# EAGLE board RetroLite Rev 1.3 - Main Board (EAGLE 9.6.2), part 1 of 3
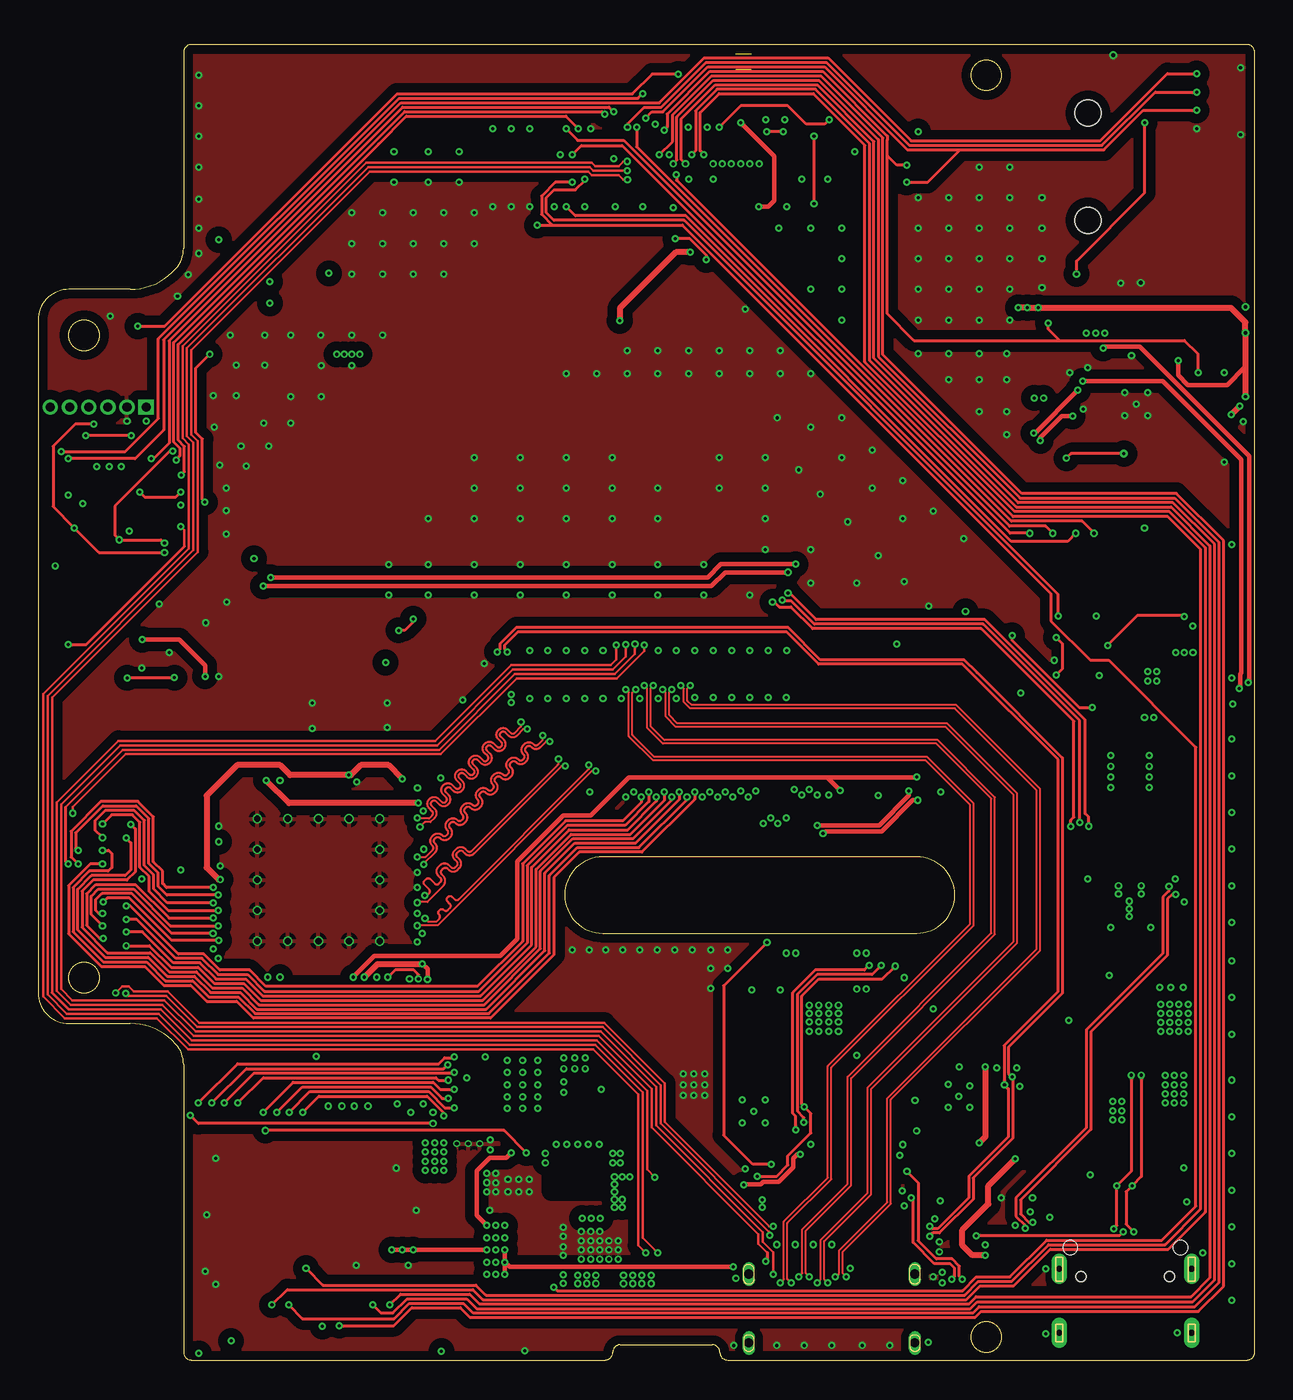
[diagram p0: board, top side]
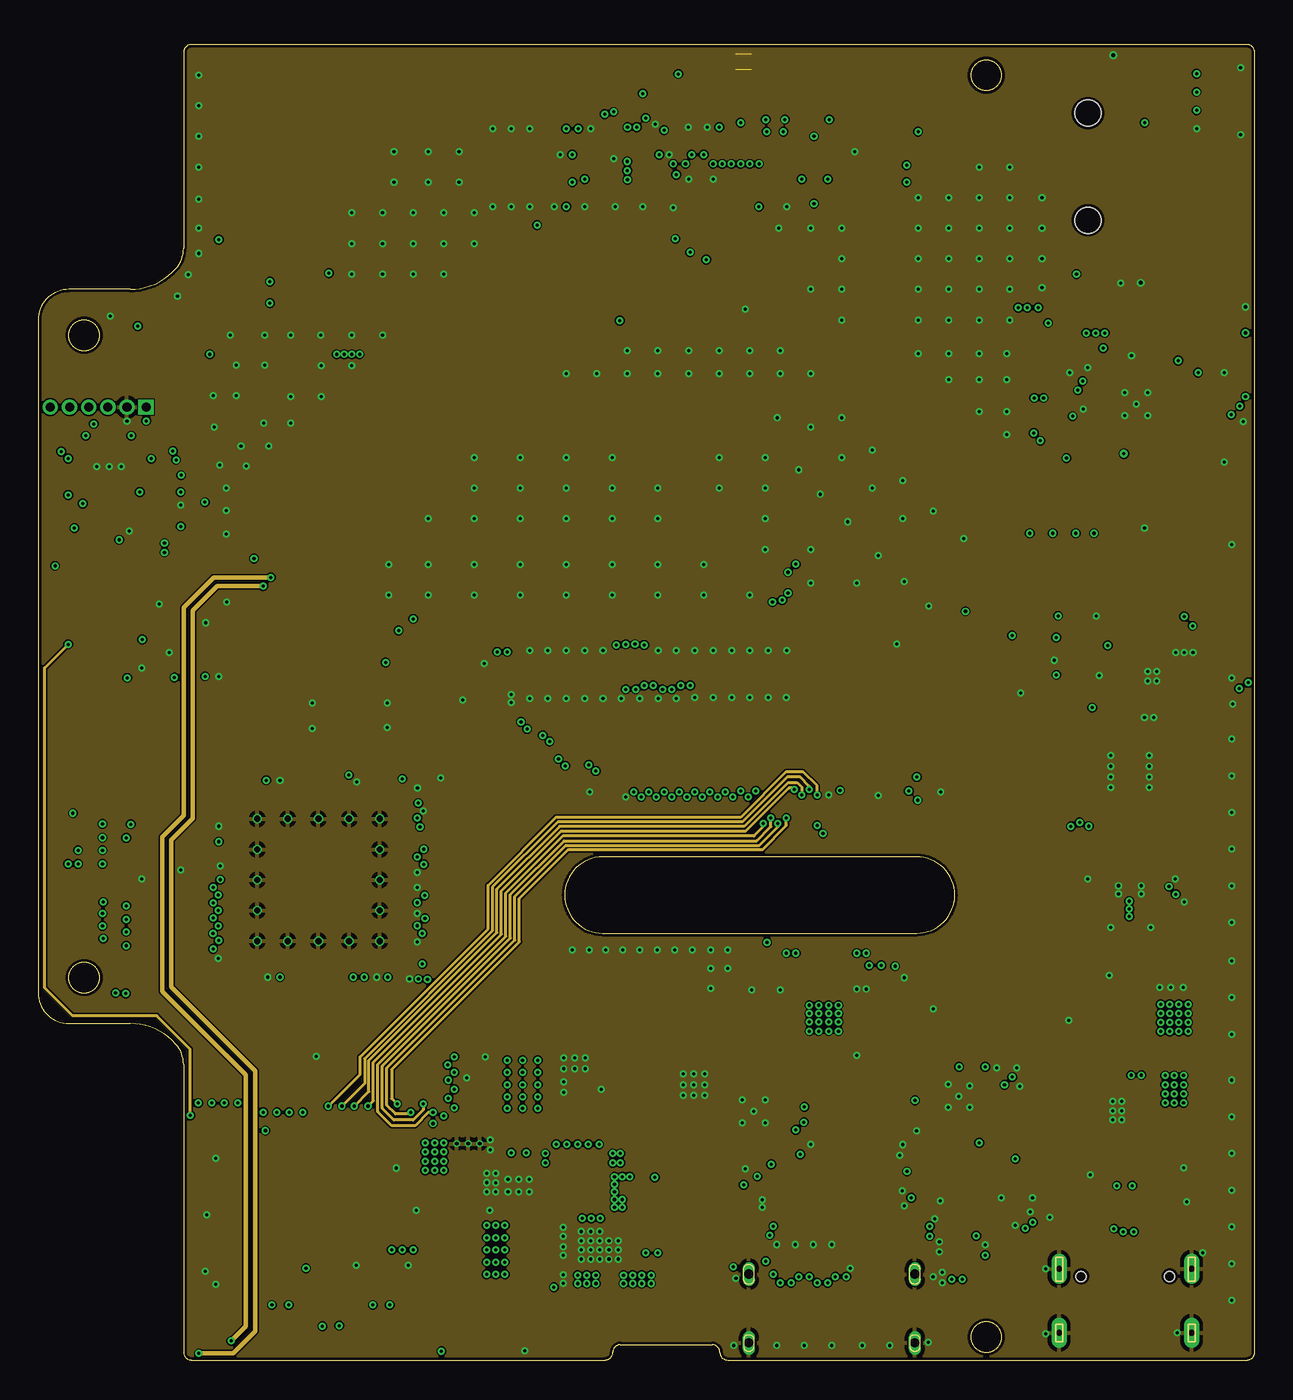
[diagram p1: board, inner layer Route2]
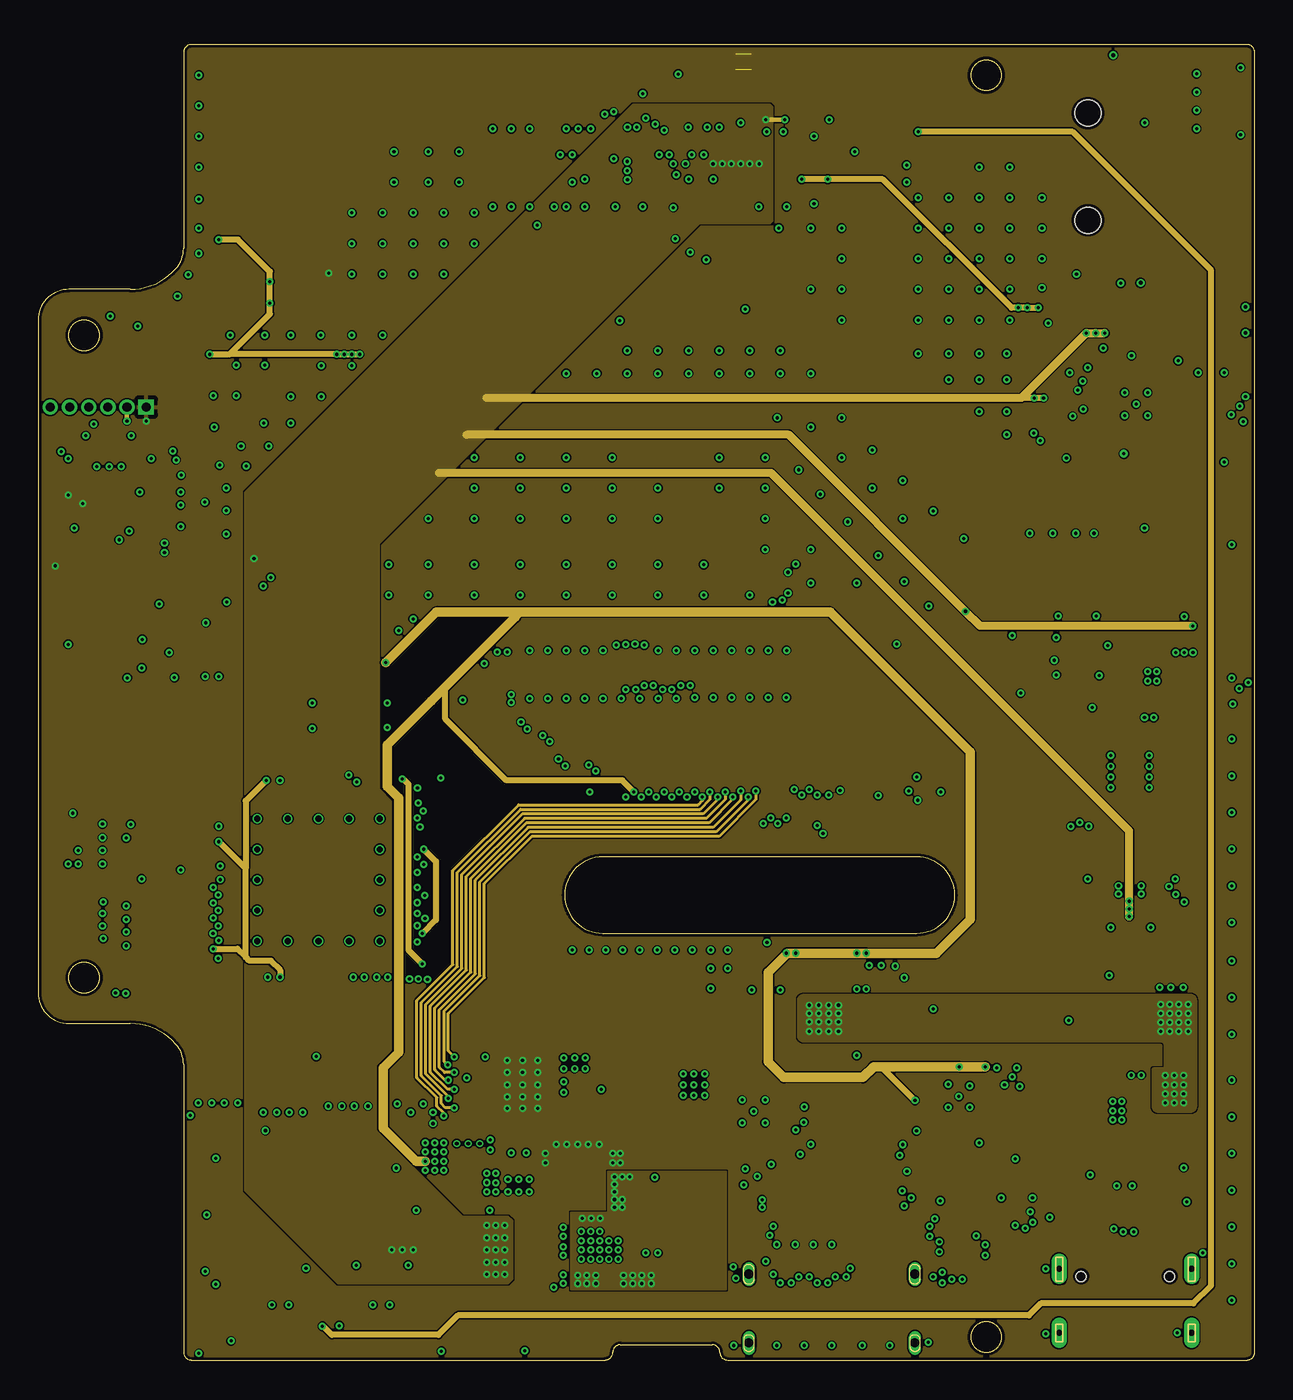
[diagram p2: board, inner layer Route15]
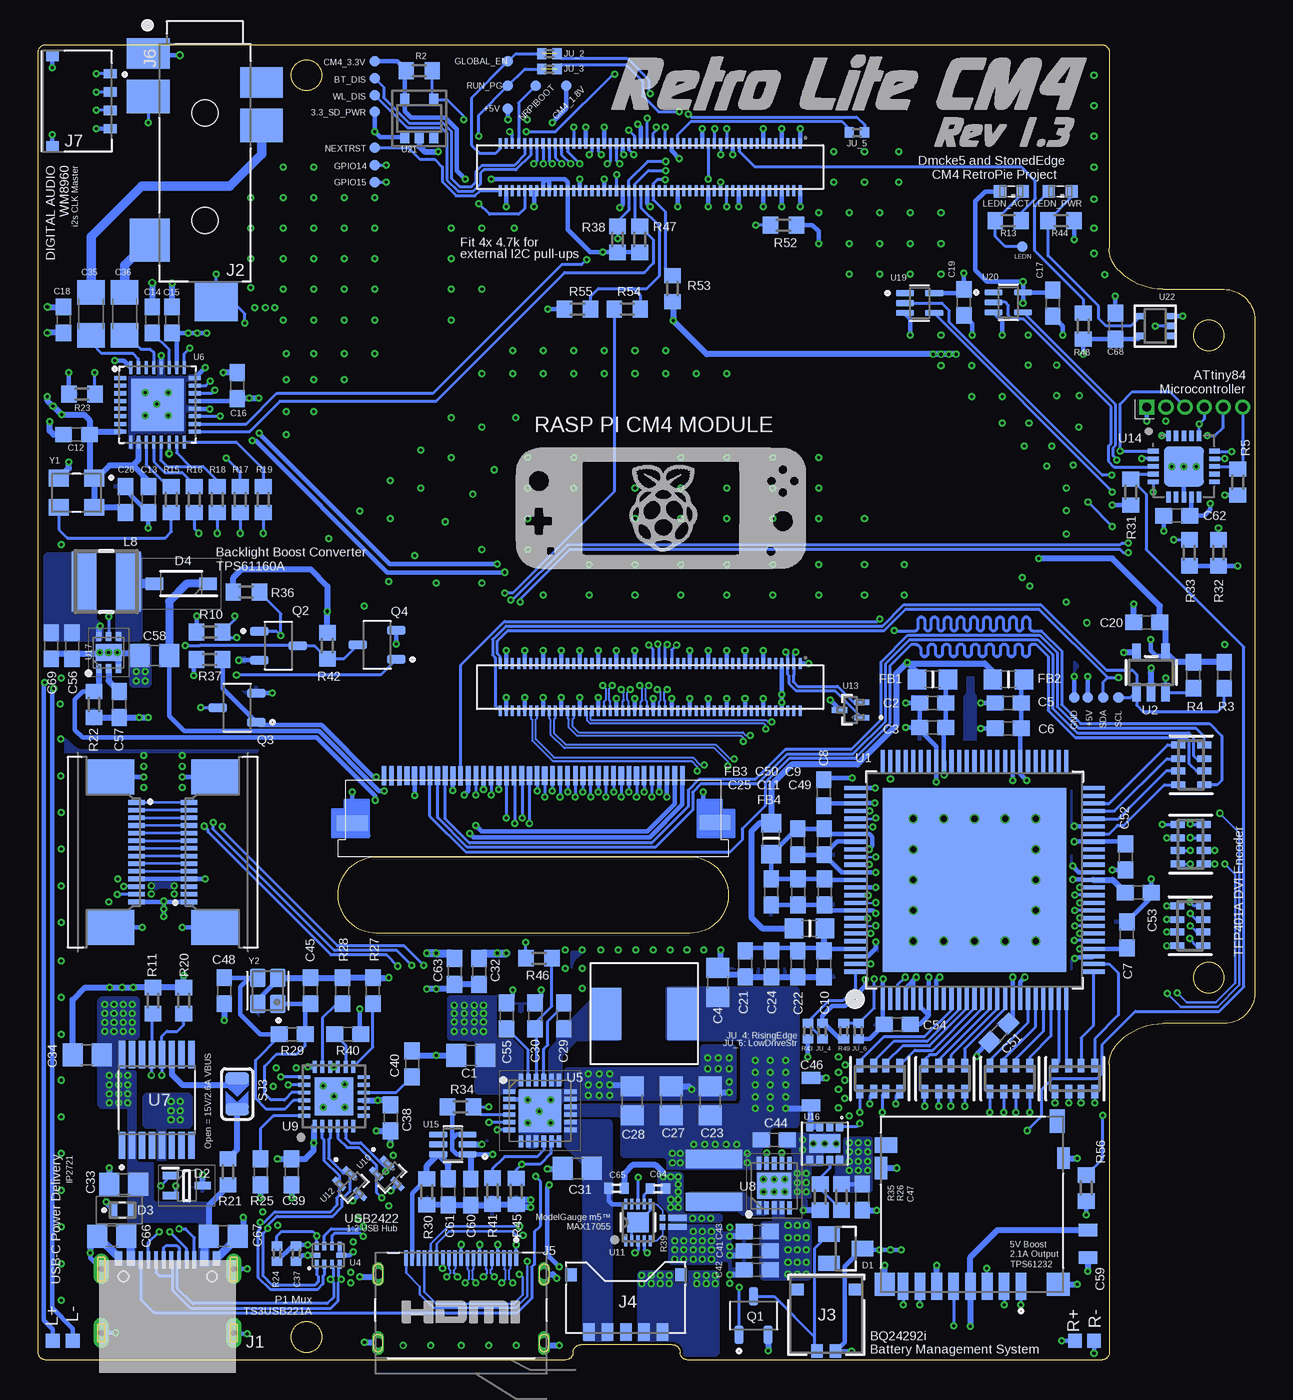
[diagram p3: board, bottom side, seen from below]

Size 79.5 x 86 mm. Coordinates in mm from the lower left corner, seen from the top.
Outline: 81 segments
Outline: circle at 3,25 radius 1
Outline: circle at 3,67 radius 1
Outline: circle at 61.96,1.5 radius 1
Outline: circle at 61.96,1.5 radius 1
Outline: circle at 61.96,84 radius 1
Outline: circle at 3,67 radius 1
Outline: circle at 3,25 radius 1
Copper layers (1+2*15+16): Top 0.035mm / dielectric 0.2mm / Route2 0.0175mm / dielectric 1.065mm / Route15 0.0175mm / dielectric 0.2mm / Bottom 0.035mm
Design rules "jlcpcb-4-layer_JLC7628-stackup *": minimum track width 3.5mil, minimum drill 0.2mm, track to track 3.5mil, track to pad 5mil, pad to pad 5mil, via to via 5mil, smd to smd 0mil, copper to edge 0.2mm, drill to drill 5mil, minimum pad ring 0.1mm, minimum via ring 0.13mm, stop-mask expansion 0mil, vias tented up to drill 100mil, thermal gap 10mil
Net classes: 1 USB 2.0 Differential Pair: width 0.192 mm, clearance 0.114 mm; 2 HDMI: width 0.126 mm, clearance 0.102 mm
bKeepout: area 36.5,19.5 to 43.2,25.9; 70 lines
tRestrict: area 33.5,11 to 37.1,12.4; area 74.5,49.1 to 75.6,52.7; area 60.7,19.6 to 61.2,20; area 5.5,54.1 to 9.2,56.1; area 1.5,53.3 to 6.7,58.7; area 45.4,13.4 to 50.2,26.6; area 52.4,21.8 to 55.7,24.3; area 56.1,8.9 to 61.4,19.4; area 53.2,5.1 to 57.4,9.8; area 46.8,9.5 to 51,13.9; area 22.8,78.8 to 34.3,80.9; area 69.9,64.3 to 78.1,68.2; 18 more areas; 1 lines
bRestrict: area 36.5,19.4 to 43.3,25.9; area 33.5,11.1 to 37.1,12.4; area 74.5,49.1 to 75.6,52.7; area 40.8,80.5 to 43.8,83.8; area 4.8,61 to 6.4,61.7; area 5,51.9 to 6.8,54.8; area 15.6,37.5 to 20.2,38.1; area 27.9,17.5 to 29.6,20.4; area 31.1,43.3 to 49.1,44.7; area 52.7,33.4 to 57.2,37.1; area 67.4,47.4 to 70.4,50.4; area 68.2,41.6 to 70.4,45.5; 31 more areas; 86 lines

## Footprints (pad centres in the part's own frame; a part is rotated, then mirrored left to right if it is on the bottom)
HRS_DF40C-100DS-0.4V(51) = smd 0.2 x 0.7: 1 -9.8,-1.54; 2 -9.8,1.54; 3 -9.4,-1.54; 4 -9.4,1.54; 5 -9,-1.54; 6 -9,1.54; 7 -8.6,-1.54; 8 -8.6,1.54; 9 -8.2,-1.54; 10 -8.2,1.54; 11 -7.8,-1.54; 12 -7.8,1.54; 13 -7.4,-1.54; 14 -7.4,1.54; 15 -7,-1.54; 16 -7,1.54; 17 -6.6,-1.54; 18 -6.6,1.54; 19 -6.2,-1.54; 20 -6.2,1.54; 21 -5.8,-1.54; 22 -5.8,1.54; 23 -5.4,-1.54; 24 -5.4,1.54; 25 -5,-1.54; 26 -5,1.54; 27 -4.6,-1.54; 28 -4.6,1.54; 29 -4.2,-1.54; 30 -4.2,1.54; 31 -3.8,-1.54; 32 -3.8,1.54; 33 -3.4,-1.54; 34 -3.4,1.54; 35 -3,-1.54; 36 -3,1.54; 37 -2.6,-1.54; 38 -2.6,1.54; 39 -2.2,-1.54; 40 -2.2,1.54; 41 -1.8,-1.54; 42 -1.8,1.54; 43 -1.4,-1.54; 44 -1.4,1.54; 45 -1,-1.54; 46 -1,1.54; 47 -0.6,-1.54; 48 -0.6,1.54; 49 -0.2,-1.54; 50 -0.2,1.54; 51 0.2,-1.54; 52 0.2,1.54; 53 0.6,-1.54; 54 0.6,1.54; 55 1,-1.54; 56 1,1.54; 57 1.4,-1.54; 58 1.4,1.54; 59 1.8,-1.54; 60 1.8,1.54; 61 2.2,-1.54; 62 2.2,1.54; 63 2.6,-1.54; 64 2.6,1.54; 65 3,-1.54; 66 3,1.54; 67 3.4,-1.54; 68 3.4,1.54; 69 3.8,-1.54; 70 3.8,1.54; 71 4.2,-1.54; 72 4.2,1.54; 73 4.6,-1.54; 74 4.6,1.54; 75 5,-1.54; 76 5,1.54; 77 5.4,-1.54; 78 5.4,1.54; 79 5.8,-1.54; 80 5.8,1.54; 81 6.2,-1.54; 82 6.2,1.54; 83 6.6,-1.54; 84 6.6,1.54; 85 7,-1.54; 86 7,1.54; 87 7.4,-1.54; 88 7.4,1.54; 89 7.8,-1.54; 90 7.8,1.54; 91 8.2,-1.54; 92 8.2,1.54; 93 8.6,-1.54; 94 8.6,1.54; 95 9,-1.54; 96 9,1.54; 97 9.4,-1.54; 98 9.4,1.54; 99 9.8,-1.54; 100 9.8,1.54
TP07R = smd 0.7 x 0.7: TP 0,0
C0805 = smd 1.3 x 1.5: 1 -0.95,0; 2 0.95,0
0603-NO = smd 1.1 x 1: 1 -0.85,0; 2 0.85,0
C0603 = smd 1.1 x 1: 1 -0.85,0; 2 0.85,0
C1206 = smd 1.6 x 1.8: 1 -1.4,0; 2 1.4,0
R0402 = smd 0.6 x 0.7: 1 -0.5,0; 2 0.5,0
0603 = smd 1.1 x 1: 1 -0.85,0; 2 0.85,0
0805 = smd 0.8 x 1.2: 1 -0.9,0; 2 0.9,0
C0402 = smd 0.6 x 0.7: 1 -0.5,0; 2 0.5,0
SOT23 = smd 1 x 1.4: 1 -0.95,-1.1; 2 0.95,-1.1; 3 0,1.1
SOT65P210X110-3N = smd 1.05 x 0.5: 1 -1.05,0.65; 2 -1.05,-0.65; 3 1.05,0
ESDA8P801U1M = smd 0.55 x 0.8: 1 -0.625,0; 2 0.625,0
SOD3716X135N = smd 1.15 x 0.8: 1 -1.75,0; 2 1.75,0
_0805MP = smd 1.2 x 1.3: 1 -1.016,0; 2 1.016,0
U262-161N-4BVC11 = smd 0.5 x 0.95: A1B12 -3.2,7.455; A4B9 -2.4,7.455; B1A12 3.2,7.455; B4A9 2.4,7.455 | smd 0.25 x 1.15: A5 -1.25,7.355; A6 -0.25,7.355; A7 0.25,7.355; A8 1.25,7.355; B5 1.75,7.355; B6 0.75,7.355; B7 -0.75,7.355; B8 -1.75,7.355 | drill 0.4 pad 1 long: SHIELD_1 -4.325,6.78; SHIELD_2 -4.325,2.6; SHIELD_3 4.325,6.78; SHIELD_4 4.325,2.6 | hole 0.65: -2.89,6.28; 2.89,6.28
CUI_SJ-43516-SMT = smd 2 x 2.8: 1 -7.15,-3.7; 6 -5.25,3.7 | smd 2.8 x 2.6: 2 5.05,-3.6 | smd 2.2 x 2.8: 3 -2.45,3.7; 4 -4.35,-3.7 | smd 2.6 x 2.8: 5 9.05,0.75 | hole 1.7: -3.25,0; 3.75,0
CONN_2026560021_MOL = smd 0.762 x 0.889: 1 -0.6,2.374; 2 0.6,2.374 | smd 0.838 x 0.762: 3 -1.9,-1.651; 4 1.9,-1.651
MOLEX_78171-0005 = smd 0.75 x 1.143: 1 -2.4,1.875; 2 -1.2,1.875; 3 0,1.875; 4 1.2,1.875; 5 2.4,1.875 | smd 0.75 x 0.85: P$6 -3.6,-1.875; P$7 3.575,-1.875
WURTH_685119136923 = smd 0.23 x 1: 1 3.6,0; 2 3.2,0; 3 2.8,0; 4 2.4,0; 5 2,0; 6 1.6,0; 7 1.2,0; 8 0.8,0; 9 0.4,0; 10 0,0; 11 -0.4,0; 12 -0.8,0; 13 -1.2,0; 14 -1.6,0; 15 -2,0; 16 -2.4,0; 17 -2.8,0; 18 -3.2,0; 19 -3.6,0 | drill 0.6 pad 0.762 long: S1 -5.425,-1.05; S2 -5.425,-5.55; S3 5.425,-5.55; S4 5.425,-1.05
MOLEX_0781710004 = smd 0.6 x 0.85: 1 -1.8,0; 2 -0.6,0; 3 0.6,0; 4 1.8,0 | smd 0.7 x 0.8: S1 2.95,-3.775; S2 -2.95,-3.775
ASPI-0630HI = smd 2 x 3.4: P$1 -2.5,0; P$2 2.5,0
VLCF4020_1 = smd 3.9 x 1.6: 1 0,-1.45; 2 0,1.45
TP09SQ = smd 0.9 x 0.9: TP 0,0
SML0603 = smd 0.8 x 0.8: A 0.75,0; C -0.75,0
TE_1-1734839-4 = smd 0.3 x 1.1: 1 -3.25,0; 2 -2.75,0; 3 -2.25,0; 4 -1.75,0; 5 -1.25,0; 6 -0.75,0; 7 -0.25,0; 8 0.25,0; 9 0.75,0; 10 1.25,0; 11 1.75,0; 12 2.25,0; 13 2.75,0; 14 3.25,0 | smd 2.3 x 3.1: P1 -4.92,-1.7; P2 4.92,-1.7
AMPHENOL_1140084168 = smd 0.7 x 1.75: 1 3.2,-0.875; 2 2.1,-0.875; 3 1,-0.875; 4 -0.1,-0.875; 5 -1.2,-0.875; 6 -2.3,-0.875; 7 -3.4,-0.875; 8 -4.5,-0.875 | smd 1 x 1.55: 9 5.575,9.925 | smd 1.45 x 1: 10 -5.625,8.35 | smd 1.5 x 1.5: S1 5.65,-0.75 | smd 1.3 x 1.5: S2 -5.7,-0.75 | smd 0.8 x 1.4: S3 5.975,7.5 | smd 0.8 x 1.5: S4 -5.95,6.85
IC-RT9742 = smd 0.6 x 0.8: /FLG 0.94,-1.25; EN 0.94,1.196; GND 0,-1.25; VIN -0.94,1.196; VOUT -0.94,-1.25
SOT95P280X125-3N = smd 1.21 x 0.59: 1 -1.255,0.95; 2 -1.255,-0.95; 3 1.255,0
RESPACK_4X0603 = smd 0.45 x 0.9: 1 -1.3,-0.85; 2 -0.4,-0.85; 3 0.4,-0.85; 4 1.3,-0.85; 5 1.3,0.85; 6 0.4,0.85; 7 -0.4,0.85; 8 -1.3,0.85
R0603 = smd 1 x 1.1: 1 -0.85,0; 2 0.85,0
PS0306DRF7T0R01L = smd 0.4 x 1.2: 1 -0.3,-0.075; 4 0.3,-0.075 | smd 0.4 x 0.35: 2 -0.3,0.9; 3 0.3,0.9
SOLDERJUMPER_ARROW_NOPASTE = smd 0.762 x 1.524: 1 -1.016,0; 2 1.016,0
S-PQFP-G100 = smd 0.27 x 1.5: 1 -6,-7.75; 2 -5.5,-7.75; 3 -5,-7.75; 4 -4.5,-7.75; 5 -4,-7.75; 6 -3.5,-7.75; 7 -3,-7.75; 8 -2.5,-7.75; 9 -2,-7.75; 10 -1.5,-7.75; 11 -1,-7.75; 12 -0.5,-7.75; 13 0,-7.75; 14 0.5,-7.75; 15 1,-7.75; 16 1.5,-7.75; 17 2,-7.75; 18 2.5,-7.75; 19 3,-7.75; 20 3.5,-7.75; 21 4,-7.75; 22 4.5,-7.75; 23 5,-7.75; 24 5.5,-7.75; 25 6,-7.75; 51 6,7.75; 52 5.5,7.75; 53 5,7.75; 54 4.5,7.75; 55 4,7.75; 56 3.5,7.75; 57 3,7.75; 58 2.5,7.75; 59 2,7.75; 60 1.5,7.75; 61 1,7.75; 62 0.5,7.75; 63 0,7.75; 64 -0.5,7.75; 65 -1,7.75; 66 -1.5,7.75; 67 -2,7.75; 68 -2.5,7.75; 69 -3,7.75; 70 -3.5,7.75; 71 -4,7.75; 72 -4.5,7.75; 73 -5,7.75; 74 -5.5,7.75; 75 -6,7.75 | smd 1.5 x 0.27: 26 7.75,-6; 27 7.75,-5.5; 28 7.75,-5; 29 7.75,-4.5; 30 7.75,-4; 31 7.75,-3.5; 32 7.75,-3; 33 7.75,-2.5; 34 7.75,-2; 35 7.75,-1.5; 36 7.75,-1; 37 7.75,-0.5; 38 7.75,0; 39 7.75,0.5; 40 7.75,1; 41 7.75,1.5; 42 7.75,2; 43 7.75,2.5; 44 7.75,3; 45 7.75,3.5; 46 7.75,4; 47 7.75,4.5; 48 7.75,5; 49 7.75,5.5; 50 7.75,6; 76 -7.75,6; 77 -7.75,5.5; 78 -7.75,5; 79 -7.75,4.5; 80 -7.75,4; 81 -7.75,3.5; 82 -7.75,3; 83 -7.75,2.5; 84 -7.75,2; 85 -7.75,1.5; 86 -7.75,1; 87 -7.75,0.5; 88 -7.75,0; 89 -7.75,-0.5; 90 -7.75,-1; 91 -7.75,-1.5; 92 -7.75,-2; 93 -7.75,-2.5; 94 -7.75,-3; 95 -7.75,-3.5; 96 -7.75,-4; 97 -7.75,-4.5; 98 -7.75,-5; 99 -7.75,-5.5; 100 -7.75,-6 | drill 0.4: P$1 -4,4; P$2 -2,4; P$3 0,4; P$4 2,4; P$5 4,4; P$6 4,2; P$7 4,0; P$8 4,-2; P$9 4,-4; P$10 2,-4; P$11 0,-4; P$12 -2,-4; P$13 -4,-4; P$14 -4,-2; P$15 -4,0; P$16 -4,2 | smd 12 x 12: THERMAL 0,0
SOT23-5 = smd 0.55 x 1.2: 1 -0.95,-1.3; 2 0,-1.3; 3 0.95,-1.3; 4 0.95,1.3; 5 -0.95,1.3
S62684-402100ALF = smd 2 x 1: P$1 -11.83,2.19; P$2 11.87,2.24 | smd 0.3 x 1.2: P$3 -9.75,5.3; P$4 -9.25,5.3; P$5 -8.75,5.3; P$6 -8.25,5.3; P$7 -7.75,5.3; P$8 -7.25,5.3; P$9 -6.75,5.3; P$10 -6.25,5.3; P$11 -5.75,5.3; P$12 -5.25,5.3; P$13 -4.75,5.3; P$14 -4.25,5.3; P$15 -3.75,5.3; P$16 -3.25,5.3; P$17 -2.75,5.3; P$18 -2.25,5.3; P$19 -1.75,5.3; P$20 -1.25,5.3; P$21 -0.75,5.3; P$22 -0.25,5.3; P$23 0.25,5.3; P$24 0.75,5.3; P$25 1.25,5.3; P$26 1.75,5.3; P$27 2.25,5.3; P$28 2.75,5.3; P$29 3.25,5.3; P$30 3.75,5.3; P$31 4.25,5.3; P$32 4.75,5.3; P$33 5.25,5.3; P$34 5.75,5.3; P$35 6.25,5.3; P$36 6.75,5.3; P$37 7.25,5.3; P$38 7.75,5.3; P$39 8.25,5.3; P$40 8.75,5.3; P$41 9.25,5.3; P$42 9.75,5.3
QFN-10-RSE = smd 0.58 x 0.25: 1 -0.6,0.75; 2 -0.6,0.25; 3 -0.6,-0.25; 4 -0.6,-0.75; 6 0.6,-0.75; 7 0.6,-0.25; 8 0.6,0.25; 9 0.6,0.75 | smd 0.35 x 0.63: 5 0,-0.85; 10 0,0.85
QFN50P400X400X100-25N = smd 0.8 x 0.3: 1 -2,1.25; 2 -2,0.75; 3 -2,0.25; 4 -2,-0.25; 5 -2,-0.75; 6 -2,-1.25; 13 2,-1.25; 14 2,-0.75; 15 2,-0.25; 16 2,0.25; 17 2,0.75; 18 2,1.25 | smd 0.3 x 0.8: 7 -1.25,-2; 8 -0.75,-2; 9 -0.25,-2; 10 0.25,-2; 11 0.75,-2; 12 1.25,-2; 19 1.25,2; 20 0.75,2; 21 0.25,2; 22 -0.25,2; 23 -0.75,2; 24 -1.25,2 | smd 2.8 x 2.8: 25 0,0
QFN50P500X500X100-33N = smd 0.86 x 0.27: 1 -2.435,1.75; 2 -2.435,1.25; 3 -2.435,0.75; 4 -2.435,0.25; 5 -2.435,-0.25; 6 -2.435,-0.75; 7 -2.435,-1.25; 8 -2.435,-1.75; 17 2.435,-1.75; 18 2.435,-1.25; 19 2.435,-0.75; 20 2.435,-0.25; 21 2.435,0.25; 22 2.435,0.75; 23 2.435,1.25; 24 2.435,1.75 | smd 0.27 x 0.86: 9 -1.75,-2.435; 10 -1.25,-2.435; 11 -0.75,-2.435; 12 -0.25,-2.435; 13 0.25,-2.435; 14 0.75,-2.435; 15 1.25,-2.435; 16 1.75,-2.435; 25 1.75,2.435; 26 1.25,2.435; 27 0.75,2.435; 28 0.25,2.435; 29 -0.25,2.435; 30 -0.75,2.435; 31 -1.25,2.435; 32 -1.75,2.435 | smd 3.45 x 3.45: 33 0,0
TSSOP-16 = smd 1.78 x 0.42: 1 -2.97,2.275; 2 -2.97,1.625; 3 -2.97,0.975; 4 -2.97,0.325; 5 -2.97,-0.325; 6 -2.97,-0.975; 7 -2.97,-1.625; 8 -2.97,-2.275; 9 2.97,-2.275; 10 2.97,-1.625; 11 2.97,-0.975; 12 2.97,-0.325; 13 2.97,0.325; 14 2.97,0.975; 15 2.97,1.625; 16 2.97,2.275
SON50P300X300X100-11N = smd 0.85 x 0.3: 1 -1.45,1; 2 -1.45,0.5; 3 -1.45,0; 4 -1.45,-0.5; 5 -1.45,-1; 6 1.45,-1; 7 1.45,-0.5; 8 1.45,0; 9 1.45,0.5; 10 1.45,1 | smd 1.7 x 2.25: 11 0,0
SQFN24_4X4MC_MCH = smd 0.808 x 0.255: 1 -1.941,1.27; 2 -1.941,0.762; 3 -1.941,0.254; 4 -1.941,-0.254; 5 -1.941,-0.762; 6 -1.941,-1.27; 13 1.941,-1.27; 14 1.941,-0.762; 15 1.941,-0.254; 16 1.941,0.254; 17 1.941,0.762; 18 1.941,1.27 | smd 0.255 x 0.808: 7 -1.27,-1.941; 8 -0.762,-1.941; 9 -0.254,-1.941; 10 0.254,-1.941; 11 0.762,-1.941; 12 1.27,-1.941; 19 1.27,1.941; 20 0.762,1.941; 21 0.254,1.941; 22 -0.254,1.941; 23 -0.762,1.941; 24 -1.27,1.941 | smd 2.489 x 2.489: 25 0,0
SC75-3L_SEM = smd 0.365 x 1.005: 1 -0.495,-0.724; 2 0.495,-0.724; 3 0,0.724
21-100013A_T102A2+1C_MXM = smd 0.711 x 0.203: 1 -1.194,0.8; 2 -1.194,0.4; 3 -1.194,0; 4 -1.194,-0.4; 5 -1.194,-0.8; 6 1.194,-0.8; 7 1.194,-0.4; 8 1.194,0; 9 1.194,0.4; 10 1.194,0.8 | smd 1.295 x 1.397: 11 0,0
QFN20G-0.5-4X4MM = smd 0.7 x 0.3: 1 -2,1; 2 -2,0.5; 3 -2,0; 4 -2,-0.5; 5 -2,-1; 11 2,-1; 12 2,-0.5; 13 2,0; 14 2,0.5; 15 2,1 | smd 0.3 x 0.7: 6 -1,-2; 7 -0.5,-2; 8 0,-2; 9 0.5,-2; 10 1,-2; 16 1,2; 17 0.5,2; 18 0,2; 19 -0.5,2; 20 -1,2 | smd 2.6 x 2.6: PAD 0,0
SOT65P210X110-6N = smd 1.19 x 0.4: 1 -0.96,0.65; 2 -0.96,0; 3 -0.96,-0.65; 4 0.96,-0.65; 5 0.96,0; 6 0.96,0.65
SON65P280X300X133-9N = smd 0.63 x 0.5: 1 -1.1,0.975; 2 -1.1,0.325; 3 -1.1,-0.325; 4 -1.1,-0.975; 5 1.1,-0.975; 6 1.1,-0.325; 7 1.1,0.325; 8 1.1,0.975 | smd 1.2 x 2: 9 0,0 | drill 0.254: P$1 0,0; P$2 0,0.75; P$3 0,-0.75
SON65P200X200X80-7N = smd 0.6 x 0.35: 1 -1.05,0.65; 2 -1.05,0; 3 -1.05,-0.65; 4 1.05,-0.65; 5 1.05,0; 6 1.05,0.65 | smd 1.1 x 1.7: 7 0,0
INDUCTOR_SMALL = smd 1.2 x 3.7: 1 -1.4,0; 2 1.4,0
SOT65P210X110-5N = smd 1.19 x 0.4: 1 -0.96,0.65; 2 -0.96,0; 3 -0.96,-0.65; 4 0.96,-0.65; 5 0.96,0.65
BUF-74LVC1G07 = smd 0.42 x 0.6: A 0,-0.95; GND 0.65,-0.95; NC -0.65,-0.95; VCC -0.65,0.95; Y 0.65,0.95
1MM_PIC-PROGRAMING_HEADER = drill 0.6 pad 1 square: 1 -1.25,1 | drill 0.6 pad 1: 2 0,1; 3 1.25,1; 4 2.5,1; 5 3.75,1; 6 5.02,1
OSC_ECS-2333-160-BN-TR = smd 1.3 x 1.1: 1 -1.15,-0.95; 2 1.15,-0.95; 3 1.15,0.95; 4 -1.15,0.95
XTAL_ECS-160-10-36-JGN-TR = smd 1.2 x 1: 1 -0.85,-0.65; 2 0.85,-0.65; 3 0.85,0.65; 4 -0.85,0.65

## Placement (x,y rotation side)
1-100  DF40C-100DS-0.4V(51)  [HRS_DF40C-100DS-0.4V(51)]  39.51,78 180 bottom
3.3_SD_PWR  TPTP07R  [TP07R]  57.5,81.6 0 bottom
101-200  DF40C-100DS-0.4V(51)  [HRS_DF40C-100DS-0.4V(51)]  39.51,43.99 180 bottom
+5V  TPTP07R  [TP07R]  48.8,81.8 0 bottom
BT_DIS  TPTP07R  [TP07R]  57.5,83.8 0 bottom
C1  1µF  [C0805]  51.22,19.92 0 bottom
C2  0.01uF  [0603-NO]  21.05,42.95 180 bottom
C3  0.01uF  [0603-NO]  21.05,41.35 180 bottom
C4  10µF  [C0805]  35.09,24.69 270 bottom
C5  0.01uF  [0603-NO]  16.1,42.95 180 bottom
C6  0.01uF  [0603-NO]  16.1,41.3 180 bottom
C7  0.01uF  [0603-NO]  8.35,27.8 90 bottom
C8  0.01uF  [0603-NO]  28.16,37.09 90 bottom
C9  0.01uF  [0603-NO]  28.13,33.88 270 bottom
C10  0.01uF  [0603-NO]  28.15,25.9 270 bottom
C11  0.01uF  [0603-NO]  29.85,30.61 270 bottom
C12  0.1uF  [C0603]  77,60.5 180 bottom
C13  0.1uF  [C0603]  72.3,56.25 270 bottom
C14  4.7uF  [C0603]  72.05,68 90 bottom
C15  4.7uF  [C0603]  70.75,68 90 bottom
C16  4.7uF  [C0603]  66.5,63.7 90 bottom
C17  0.1uF  [C0603]  13.2,69.1 270 bottom
C18  0.1uF  [C0603]  77.85,68 270 bottom
C19  0.1uF  [C0603]  19,69.15 90 bottom
C20  0.1uF  [0603-NO]  7.05,48.23 180 bottom
C21  0.01uF  [0603-NO]  33.3,25.9 270 bottom
C22  0.01uF  [0603-NO]  29.87,25.9 270 bottom
C23  10µF  [C0805]  35.58,16.95 270 bottom
C24  22uF  [0603-NO]  31.58,25.9 270 bottom
C25  0.01uF  [0603-NO]  31.6,30.61 270 bottom
C26  0.1uF  [C0603]  73.8,56.25 270 bottom
C27  10µF  [C0805]  38.13,16.95 270 bottom
C28  10µF  [C0805]  40.68,16.95 270 bottom
C29  0.047µF  [C0603]  45.16,22.5 90 bottom
C30  1uF  [C0603]  47.03,22.5 270 bottom
C31  10µF  [C0805]  44.27,12.52 0 bottom
C32  1uF  [0603-NO]  50.7,25.4 270 bottom
C33  1uF  [C0805]  73.91,11.5 180 bottom
C34  1uF  [C0805]  76.3,19.95 180 bottom
C35  100uF  [C1206]  76.05,68.4 90 bottom
C36  100uF  [C1206]  73.85,68.4 90 bottom
C37  0.1uF  [R0402]  62.65,6.95 270 bottom
C38  1uF  [C0603]  56.48,15.83 270 bottom
C39  100nF  [C0603]  62.94,12.3 270 bottom
C40  1uF  [C0603]  55.07,19.37 270 bottom
C41  1.0uF  [0603]  32.52,7.14 180 bottom
C42  1.0uF  [0603]  32.52,5.89 180 bottom
C43  1.0uF  [0603]  32.5,8.4 180 bottom
C44  1.0uF  [0603]  31.4,14.4 180 bottom
C45  18pF  [C0603]  61.7,24.15 90 bottom
C46  10uF  [0805]  29,17.55 270 bottom
C47  1.0uF  [0603]  25.65,10.65 90 bottom
C48  18pF  [C0603]  67.35,24.15 270 bottom
C49  0.01uF  [0603-NO]  28.12,30.61 270 bottom
C50  22uF  [0603-NO]  29.87,33.88 270 bottom
C51  0.01uF  [0603-NO]  16.71,21.4 225 bottom
C52  22uF  [0603-NO]  8.44,32.9 270 bottom
C53  0.01uF  [0603-NO]  7.6,30.55 0 bottom
C54  0.01uF  [0603-NO]  23.35,21.95 180 bottom
C55  1uF  [C0603]  48.9,22.5 270 bottom
C56  1µF  [C0603]  77.3,46.7 270 bottom
C57  220nF  [C0603]  74.2,42.85 90 bottom
C58  4.7µF 50v  [C0805]  71.9,46.05 180 bottom
C59  10uF  [0805]  10.9,7.6 90 bottom
C60  1uF  [0603-NO]  51.24,10.98 270 bottom
C61  18nF  [0603-NO]  52.7,11 270 bottom
C62  0.1uF  [C0603]  5.1,55.2 0 bottom
C63  1uF  [0603-NO]  52.3,25.4 270 bottom
C64  0.47uF  [C0402]  39,11.2 0 bottom
C65  0.1uF  [C0402]  41.71,11.23 0 bottom
C66  10uF  [C0805]  74.7,8.1 0 bottom
C67  10uF  [C0805]  67.4,8.1 180 bottom
C68  1.0uF  [0603]  9.1,67.6 270 bottom
C69  1µF  [C0603]  78.65,46.7 270 bottom
CM4_1.8V  TPTP07R  [TP07R]  45,83.3 180 bottom
CM4_3.3V  TPTP07R  [TP07R]  57.5,84.9 0 bottom
D1  BAS70  [SOT23]  26.73,7.28 270 bottom
D2  ESDA25W  [SOT65P210X110-3N]  69.8,11.4 0 bottom
D3  ESDA25P35-1U1M  [ESDA8P801U1M]  74,9.8 0 bottom
D4  MBR0540T1G  [SOD3716X135N]  70.15,50.75 180 bottom
FB1  Ferrite  [_0805MP]  21.05,44.5 0 bottom
FB2  Ferrite  [_0805MP]  16.1,44.5 0 bottom
FB3  Ferrite  [_0805MP]  31.6,34.08 270 bottom
FB4  Ferrite  [_0805MP]  29.09,28.22 0 bottom
GLOBAL_EN  TPTP07R  [TP07R]  48.8,84.9 0 bottom
GPIO14  TPTP07R  [TP07R]  57.5,78.12 0 bottom
GPIO15  TPTP07R  [TP07R]  57.5,77 0 bottom
J1  U262-161N-4BVC11  [U262-161N-4BVC11]  71.05,-0.82 0 bottom
J2  SJ-43516-SMT  [CUI_SJ-43516-SMT]  68.61,78.27 270 bottom
J3  2026560021  [CONN_2026560021_MOL]  28,2.95 180 bottom
J4  78171-0005  [MOLEX_78171-0005]  41.1,3.7 180 bottom
J5  685119136923  [WURTH_685119136923]  51.86,6.67 0 bottom
J6  0781710004  [MOLEX_0781710004]  74.8,82.3 270 bottom
JU_2  0  [R0402]  46.1,85.4 0 bottom
JU_3  0  [R0402]  46.1,84.4 0 bottom
JU_4  0  [R0402]  28.25,21.5 90 bottom
JU_5  0  [R0402]  26,80.25 180 bottom
JU_6  0  [R0402]  25.9,21.5 90 bottom
L6  ASPI-0630HI  [ASPI-0630HI]  39.89,22.64 0 bottom
L8  22µH  [VLCF4020_1]  75.05,50.9 270 bottom
L+  TPSTP09SQ  [TP09SQ]  78.55,1.25 0 bottom
L-  TPSTP09SQ  [TP09SQ]  77.25,1.25 0 bottom
LEDN  TPTP07R  [TP07R]  15.2,72.8 0 bottom
LEDN_ACT  [SML0603]  15.9,76.4 180 bottom
LEDN_PWR  [SML0603]  12.7,76.4 180 bottom
LEFTPCB  1-1734839-4  [TE_1-1734839-4]  69.65,33.2 90 bottom
M-SD  1140084168  [AMPHENOL_1140084168]  18.48,5.7 0 bottom
MICROSD_SWI  IC-RT9742  [IC-RT9742]  54.6,81.2 0 bottom
NEXTRST  TPTP07R  [TP07R]  57.5,79.25 0 bottom
NRPIBOOT  TPTP07R  [TP07R]  47,83.3 0 bottom
Q1  AO3400A  [SOT95P280X125-3N]  32.75,2.9 90 bottom
Q2  AO3400A  [SOT95P280X125-3N]  63.8,46.7 0 bottom
Q3  AO3400A  [SOT95P280X125-3N]  66.5,42.65 180 bottom
Q4  AO3400A  [SOT95P280X125-3N]  57.35,46.75 180 bottom
R1  33  [RESPACK_4X0603]  24.5,18.4 180 bottom
R2  12k  [R0603]  54.6,84.3 0 bottom
R3  4.7k  [0603-NO]  1.99,44.77 90 bottom
R4  4.7k  [0603-NO]  3.99,44.77 90 bottom
R5  4.7k  [R0603]  1.1,57.4 90 bottom
R6  33  [RESPACK_4X0603]  4.21,28.39 90 bottom
R7  33  [RESPACK_4X0603]  4.18,33.73 90 bottom
R8  33  [RESPACK_4X0603]  16,18.4 180 bottom
R9  33  [RESPACK_4X0603]  11.75,18.4 180 bottom
R10  10k  [R0603]  68.3,47.6 180 bottom
R11  5.1k  [R0603]  72,23.5 90 bottom
R12  33  [RESPACK_4X0603]  4.15,38.91 270 bottom
R13  1k  [R0603]  16.1,74.5 180 bottom
R14  33  [RESPACK_4X0603]  20.25,18.4 180 bottom
R15  10R  [R0603]  70.8,56.25 90 bottom
R16  10R  [R0603]  69.3,56.25 90 bottom
R17  10R  [R0603]  66.3,56.25 90 bottom
R18  10R  [R0603]  67.8,56.25 90 bottom
R19  10R  [R0603]  64.8,56.25 90 bottom
R20  5.1k  [R0603]  70,23.5 90 bottom
R21  100k  [R0603]  67.1,12.3 90 bottom
R22  5Ω  [R0603]  75.86,42.86 270 bottom
R23  10K  [R0603]  76.65,63.15 180 bottom
R24  100K  [R0402]  63.9,6.95 270 bottom
R25  12k  [0603]  64.98,12.3 270 bottom
R26  510K  [R0603]  27,10.65 90 bottom
R27  56k  [0603]  57.63,24.15 90 bottom
R28  56k  [0603]  59.62,24.15 90 bottom
R29  56k  [0603]  62.9,21.3 180 bottom
R30  1K  [R0603]  54.1,11 270 bottom
R31  10k  [R0603]  8.1,56.75 90 bottom
R32  4.7k  [R0603]  2.37,52.77 90 bottom
R33  4.7k  [R0603]  4.26,52.77 90 bottom
R34  10k  [R0603]  51.9,16.55 0 bottom
R35  162K  [R0603]  28.4,10.65 90 bottom
R36  10k  [R0603]  65.9,50.2 180 bottom
R37  10k  [R0603]  68.3,45.8 0 bottom
R38  4.7k  [R0603]  41.64,73.27 90 bottom
R39  PS0306DRF7T0R01L  [PS0306DRF7T0R01L]  37.8,9 90 bottom
R40  56k  [0603]  59.27,21.3 0 bottom
R41  261Ω  [R0603]  49.81,11.05 90 bottom
R42  10k  [R0603]  60.6,46.7 90 bottom
R43  10k  [R0402]  29.2,21.5 90 bottom
R44  10k  [R0603]  12.65,74.5 180 bottom
R45  10kΩ  [R0603]  48.27,11.03 90 bottom
R46  10kΩ  [R0603]  46.78,26.27 0 bottom
R47  4.7k  [R0603]  40.18,73.27 90 bottom
R48  2.2k  [R0603]  11.2,67.6 90 bottom
R49  10k  [R0402]  26.85,21.5 270 bottom
R52  10k  [R0603]  30.8,74.2 180 bottom
R53  4.7k  [R0603]  38.05,70.05 90 bottom
R54  1k  [R0603]  41,68.7 0 bottom
R55  15k  [R0603]  44.25,68.7 180 bottom
R56  10k  [R0603]  11,11.25 90 bottom
R+  TPSTP09SQ  [TP09SQ]  11.75,1.25 0 bottom
R-  TPSTP09SQ  [TP09SQ]  10.5,1.25 0 bottom
RIGHTPCB  1-1734839-4  [TE_1-1734839-4]  73.08,33.2 270 bottom
RUN_PG  TPTP07R  [TP07R]  48.8,83.3 180 bottom
SJ3  [SOLDERJUMPER_ARROW_NOPASTE]  66.5,17.4 270 bottom
TP1  TPTP07R  [TP07R]  8.9,43.3 0 bottom
TP2  TPTP07R  [TP07R]  9.9,43.3 0 bottom
TP3  TPTP07R  [TP07R]  10.9,43.3 0 bottom
TP4  TPTP07R  [TP07R]  11.8,43.3 90 bottom
U1  TFP401  [S-PQFP-G100]  18.31,31.39 0 bottom
U2  24LC02BT-I/OT  [SOT23-5]  6.77,44.96 0 bottom
U3  S62684-402100ALF  [S62684-402100ALF]  47.15,32.9 0 bottom
U4  TS3USB221A  [QFN-10-RSE]  60.55,6.85 90 bottom
U5  BQ24292I  [QFN50P400X400X100-25N]  46.71,16.3 0 bottom
U6  WM8960  [QFN50P500X500X100-33N]  71.7,62.45 0 bottom
U7  IP2721  [TSSOP-16]  71.75,17 90 bottom
U8  TPS61230DRCT  [SON50P300X300X100-11N]  31.4,11.4 90 bottom
U9  USB2422T/MJ  [SQFN24_4X4MC_MCH]  60.17,17.23 90 bottom
U10  RCLAMP0582BQTCT  [SC75-3L_SEM]  56.54,12.02 225 bottom
U11  MAX17055ETB+T  [21-100013A_T102A2+1C_MXM]  40.3,9 90 bottom
U12  RCLAMP0582BQTCT  [SC75-3L_SEM]  58.98,11.36 225 bottom
U13  RCLAMP0582BQTCT  [SC75-3L_SEM]  26.4,42.5 90 bottom
U14  MCU-ATTINY84A-MU(QFN20)  [QFN20G-0.5-4X4MM]  4.63,58.42 0 bottom
U15  TPS22948  [SOT65P210X110-6N]  52.4,14.1 180 bottom
U16  TPS82085  [SON65P280X300X133-9N]  28.1,14.15 270 bottom
U17  TPS61160ADRVT  [SON65P200X200X80-7N]  74.9,46.25 90 bottom
U18  INDUCTOR_SMALL  [INDUCTOR_SMALL]  35.33,11.74 90 bottom
U19  SN74LVC1G17DCKR  [SOT65P210X110-5N]  21.9,69.1 0 bottom
U20  SN74LVC1G17DCKR  [SOT65P210X110-5N]  16.1,69.15 0 bottom
U22  BUF-74LVC1G07  [BUF-74LVC1G07]  6.5,67.6 90 bottom
U$29  1MM_PIC_PROGRAMING_HEADER  [1MM_PIC-PROGRAMING_HEADER]  5.8,63.3 180 top
WL_DIS  TPTP07R  [TP07R]  57.5,82.7 90 bottom
Y1  ECS-3225MV-240-BN-TR  [OSC_ECS-2333-160-BN-TR]  77,56.7 180 bottom
Y2  ECS-240-8-36CKM-TR  [XTAL_ECS-160-10-36-JGN-TR]  64.5,24.15 90 bottom

## Library data of the parts
1-100 101-200 = DF40C-100DS-0.4V_51_; DESCRIPTION: 100 Position Connector Receptacle, Center Strip Contacts Surface Mount Gold; DIGI-KEY_PART_NUMBER: H11615CT-ND; MF: Hirose; MP: DF40C-100DS-0.4V(51); PACKAGE: None; PURCHASE-URL: https://pricing.snapeda.com/search/part/DF40C-100DS-0.4V(51)/?ref=eda
3.3_SD_PWR +5V BT_DIS CM4_1.8V CM4_3.3V GLOBAL_EN GPIO14 GPIO15 L+ L- LEDN NEXTRST NRPIBOOT R+ R- RUN_PG TP1-TP4 WL_DIS = testpad
C1 C4 C23 C27-C29 C31 C56-C58 C69 R5 R11 R20 R21 R23 R26 R30-R35 R38 R41 R45-R47 R53-R56 = resistor
C2 C3 C5-C11 C20-C22 C24 C25 C32 C49-C54 C60 C61 C63 FB1-FB4 R1 R3 R4 R6-R9 R12 R14 U1 U2 = microbuilder
C12-C19 C26 C30 C33-C36 C38-C40 C45 C48 C55 C62 C66 C67 = rcl; SPICEPREFIX: C
C37 JU_2-JU_6 R2 R10 R13 R15-R19 R22 R24 R36 R37 R42-R44 R48 R49 R52 = rcl; SPICEPREFIX: R
C41-C44 C47 C68 = SparkFun-Capacitors; PROD_ID: CAP-00868
C46 C59 = SparkFun-Capacitors; PROD_ID: CAP-11625
C64 C65 = rcl
D1 = diode
D2 = samacsys; DESCRIPTION: STMicroelectronics ESDA25W Dual Uni-Directional TVS Diode Array, 400W peak, 3-Pin SOT-323; HEIGHT: 1.1mm; MANUFACTURER_NAME: STMicroelectronics; MANUFACTURER_PART_NUMBER: ESDA25W; MOUSER_PART_NUMBER: 511-ESDA25W; MOUSER_PRICE-STOCK: https://www.mouser.com/Search/Refine.aspx?Keyword=511-ESDA25W; RS_PART_NUMBER: 0250101; RS_PRICE-STOCK: http://uk.rs-online.com/web/p/products/0250101
D3 = samacsys; DESCRIPTION: STMicroelectronics ESDA25P35-1U1M, Uni-Directional TVS Diode, 1400W, 2-Pin QFN; HEIGHT: 0mm; MANUFACTURER_NAME: STMicroelectronics; MANUFACTURER_PART_NUMBER: ESDA25P35-1U1M; MOUSER_PART_NUMBER: 511-ESDA25P35-1U1M; MOUSER_PRICE-STOCK: https://www.mouser.com/Search/Refine.aspx?Keyword=511-ESDA25P35-1U1M; RS_PART_NUMBER: 1639774P; RS_PRICE-STOCK: http://uk.rs-online.com/web/p/products/1639774P
D4 = samacsys; ALLIED_NUMBER: 70099497; ALLIED_PRICE-STOCK: http://www.alliedelec.com/on-semiconductor-mbr0540t1g/70099497/; DESCRIPTION: 0.5A 40V Schottky Rectifier, MBR0540T1G ON Semiconductor MBR0540T1G Schottky Diode, 0.5A, 40V, 2-Pin SOD-123; HEIGHT: 1.35mm; MANUFACTURER_NAME: ON Semiconductor; MANUFACTURER_PART_NUMBER: MBR0540T1G; MOUSER_PART_NUMBER: 863-MBR0540T1G; MOUSER_PRICE-STOCK: https://www.mouser.com/Search/Refine.aspx?Keyword=863-MBR0540T1G; RS_PART_NUMBER: 0463842P; RS_PRICE-STOCK: http://uk.rs-online.com/web/p/products/0463842P
J1 = gustl_U262-161N-4BVC11
J2 = SJ-43516-SMT; CUI_PURCHASE_URL: https://www.cuidevices.com/product/interconnect/connectors/audio-connectors/jacks/sj-4351x-smt-series?utm_source=snapeda.com&utm_medium=referral&utm_campaign=snapedaBOM; DESCRIPTION: 3.5 mm, 4 Conductors, Right Angle, Surface Mount (SMT), Audio Jack Connector; DIGI-KEY_PART_NUMBER: CP-43516SJCT-ND; MF: CUI Devices; MP: SJ-43516-SMT-TR; PACKAGE: None; PURCHASE-URL: https://pricing.snapeda.com/search/part/SJ-43516-SMT-TR/?ref=eda
J3 = 12401598E4_2A; BUILT_BY: EMA_Cory; COPYRIGHT: Copyright (C) 2018 Accelerated Designs. All rights reserved; DATASHEET: https://www.digikey.com/product-detail/en/molex/2026560021/WM17360TR-ND/7964819; MANUFACTURER_PART_NUMBER: 2026560021; SOURCELIBRARY: Molex_2020-01-22; VENDOR: Molex Connector Corporation
J4 = 78171-0005; AVAILABILITY: In Stock; DESCRIPTION: Connector Header Surface Mount 5 position 0.047 (1.20mm); MF: Molex; MP: 78171-0005; PACKAGE: None; PRICE: None
J5 = 685119136923; DESCRIPTION: HDMI - Mini Receptacle Connector 19 Position Surface Mount, Right Angle; Through Hole; MF: Wurth Electronics; MP: 685119136923; PACKAGE: None; PRICE: None; PURCHASE-URL: https://pricing.snapeda.com/search/part/685119136923/?ref=eda
J6 = 0781710004; AVAILABILITY: In Stock; DESCRIPTION: Connector Header Surface Mount 4 position 0.047 (1.20mm); MF: Molex; MP: 0781710004; PACKAGE: None; PRICE: None; PURCHASE-URL: https://pricing.snapeda.com/search/part/0781710004/?ref=eda
L6 = LCD Driver
L8 = samacsys; DESCRIPTION: TDK VLCF4020 Series Shielded Wire-wound SMD Inductor 22 uH +/-20% 800mA Idc; HEIGHT: mm; MANUFACTURER_NAME: TDK; MANUFACTURER_PART_NUMBER: VLCF4020T-220MR56; MOUSER_PART_NUMBER: 810-VLCF4020T220MR56; MOUSER_PRICE-STOCK: https://www.mouser.com/Search/Refine.aspx?Keyword=810-VLCF4020T220MR56; RS_PART_NUMBER: 6442781; RS_PRICE-STOCK: https://uk.rs-online.com/web/p/products/6442781
LEDN_ACT LEDN_PWR = led
LEFTPCB RIGHTPCB = 1-1734839-4; COMMENT: 1-1734839-4; DESCRIPTION: Conn FPC Connector SKT 14 POS 0.5mm Solder RA SMD T/R; DIGI-KEY_PART_NUMBER: A100295CT-ND; EU_ROHS_COMPLIANCE: Compliant; MF: TE Connectivity; MP: 1-1734839-4; PACKAGE: None; PURCHASE-URL: https://pricing.snapeda.com/search/part/1-1734839-4/?ref=eda
M-SD = 1140084168; DESCRIPTION: 10 (8 + 2) Position Card Connector Secure Digital - microSD™ Surface Mount, Right Angle Gold; DIGI-KEY_PART_NUMBER: 114-00841-68-1-ND; MF: Amphenol ICC (Commercial Products); MP: 114-00841-68; PACKAGE: None; PURCHASE-URL: https://pricing.snapeda.com/search/part/114-00841-68/?ref=eda
MICROSD_SWI U22 = Personal
Q1-Q4 = AO3400A; DESCRIPTION: N-Channel 30V 5.7A (Ta) 1.4W (Ta) Surface Mount SOT-23-3L; DIGI-KEY_PART_NUMBER: 785-1000-1-ND; MF: Alpha &; MP: AO3400A; PACKAGE: SOT-23 Alpha &amp; Omega Semiconductor
R25 R27-R29 R40 = SparkFun-Resistors; PROD_ID: RES-07828
R39 = 12401598E4_2A
SJ3 = microbuilder; BOM: EXCLUDE
U3 = s62684-402100alf (1)
U4 = TS3USB221A; AVAILABILITY: Unavailable; DESCRIPTION: ESD Protected High-Speed USB 2.0 _480-Mbps_ 1: 2 Multiplexer/Demultiplexer Switch; MF: Texas Instruments; MP: TS3USB221A; PACKAGE: None; PRICE: None
U5 = samacsys
U6 = QFN50P500X500X100-33N
U7 = IP2721; CREATED_BY: PCBLayout.com; DIGIKEY_PN: FIN1031MTCXTR-ND; MANUFACTURER: ON Semiconductor; MPN: FIN1031MTCX; PACKAGE: TSSOP-16
U8 = samacsys; DESCRIPTION: Voltage Regulators - Switching Regulators HE Sync Boost Converter; HEIGHT: 1mm; MANUFACTURER_NAME: Texas Instruments; MANUFACTURER_PART_NUMBER: TPS61230DRCT; MOUSER_PART_NUMBER: 595-TPS61230DRCT; MOUSER_PRICE-STOCK: https://www.mouser.com/Search/Refine.aspx?Keyword=595-TPS61230DRCT
U9 = 5025700893; BUILT_BY: EMA_April; COPYRIGHT: Copyright (C) 2018 Accelerated Designs. All rights reserved; MANUFACTURER_PART_NUMBER: USB2422T/MJ; SOURCELIBRARY: Microchip_2019-08-23_16; VENDOR: Microchip
U10 U12 U13 = Semtech RClamp0582B; BUILT_BY: EMA_Justin; COPYRIGHT: Copyright (C) 2018 Accelerated Designs. All rights reserved; MANUFACTURER_PART_NUMBER: RCLAMP0582BQTCT; SOURCELIBRARY: Semtech_2019-11-26; VENDOR: Semtech Corporation
U11 = My_Stuff; BUILT_BY: EMA_UL_Team; COPYRIGHT: Copyright (C) 2018 Accelerated Designs. All rights reserved; MANUFACTURER_PART_NUMBER: MAX17055ETB+T; REVISION: 1; SOURCELIBRARY: Maxim_2018-11-30; VENDOR: Maxim Integrated Products
U14 = MCU-ATTINY84A-MU_QFN20_; AVAILABILITY: Good; DESCRIPTION: AVR AVR® ATtiny Microcontroller IC 8-Bit 20MHz 8KB (4K x 16) FLASH 20-QFN-EP (4x4); MF: Microchip Technology; MP: ATTINY84A-MU; PACKAGE: WFQFN-20 Microchip; PRICE: None; PURCHASE-URL: https://pricing.snapeda.com/search/part/ATTINY84A-MU/?ref=eda
U15 = SOT65P210X110-6N
U16 = bq25895
U17 = samacsys; DESCRIPTION: White LED Driver with PWM Brightness Control in 2mm x 2mm Package. Up to 10 LEDs in Series; HEIGHT: 0.8mm; MANUFACTURER_NAME: Texas Instruments; MANUFACTURER_PART_NUMBER: TPS61160ADRVT; MOUSER_PART_NUMBER: 595-TPS61160ADRVT; MOUSER_PRICE-STOCK: https://www.mouser.com/Search/Refine.aspx?Keyword=595-TPS61160ADRVT; RS_PART_NUMBER: 7099044P; RS_PRICE-STOCK: http://uk.rs-online.com/web/p/products/7099044P
U18 = Wii PMS
U19 U20 = SN74LVC1G17DCKR; AVAILABILITY: In Stock; DESCRIPTION: Single Schmitt-Trigger Buffer 5-SC70 -40 to 125; MF: Texas Instruments; MP: SN74LVC1G17DCKR; PACKAGE: SOT-SC70-5 Texas Instruments; PRICE: None; PURCHASE-URL: https://pricing.snapeda.com/search/part/SN74LVC1G17DCKR/?ref=eda
U$29 = My_Stuff
Y1 = ECS-3225MV-240-BN-TR; DESCRIPTION: 24MHz XO (Standard) HCMOS Oscillator 1.62V ~ 3.63V Enable/Disable 4-SMD, No Lead; DIGI-KEY_PART_NUMBER: XC2876CT-ND; MF: ECS Inc.; MP: ECS-3225MV-240-BN-TR; PACKAGE: SMD-4 ECS International; PURCHASE-URL: https://pricing.snapeda.com/search/part/ECS-3225MV-240-BN-TR/?ref=eda
Y2 = ECS-240-8-36CKM-TR; DESCRIPTION: 24MHz ±10ppm Crystal 8pF 60 Ohms 4-SMD, No Lead; DIGI-KEY_PART_NUMBER: XC1557CT-ND; MF: ECS Inc.; MP: ECS-240-8-36CKM-TR; PACKAGE: SMD-4 ECS International; PURCHASE-URL: https://pricing.snapeda.com/search/part/ECS-240-8-36CKM-TR/?ref=eda

## Nets
3.3_SD_PWR: 3.3_SD_PWR.TP C59.2 M-SD.4 MICROSD_SWI.VOUT
3V3: C32.1 C37.2 C38.1 C39.1 C47.2 C63.1 FB1.1 FB2.1 FB3.1 FB4.1 R26.2 U3.P$39 U4.10 U9.1 U9.9 U9.15 U9.16 U9.18 U16.8
+5V: 1-100.77 1-100.79 1-100.81 1-100.83 1-100.85 1-100.87 +5V.TP C15.1 C16.1 C20.1 C41.1 C42.1 C43.1 C56.1 C60.1 C69.1 D1.3 J3.1 L8.1 LEFTPCB.1 R3.2 R4.2 R34.1 R36.2 R42.2 RIGHTPCB.14 TP3.TP U2.4 U6.21 U6.26 U8.3 U8.4 U8.7 U15.1 U15.3 U17.6
A2: LEFTPCB.5 RIGHTPCB.10
A3: LEFTPCB.6 RIGHTPCB.9
ACTIVE: Q3.1 R37.2 U1.8 U3.P$12
ADC: R19.2 U6.16
ANALOGIP0: 1-100.96
ANALOGIP1: 1-100.94
ASD: R12.3 U1.46
AVDD: C9.1 C11.1 C25.1 C49.1 C50.1 FB3.2 U1.82 U1.84 U1.88 U1.95
B0: R1.4 U1.10
B1: R1.3 U1.11
B2: R1.2 U1.12
B3: R1.1 U1.13
B4: R14.4 U1.14
B5: R14.3 U1.15
B6: R14.2 U1.16
B7: R14.1 U1.17
BAT: C31.2 C65.1 J4.4 J4.5 U5.13 U5.14 U11.10
BCLK: R16.2 U6.12
BMS_SDA/MOSI: R32.2 U5.6 U14.16 U$29.4
BMS_STAT: J1.B8 R34.2 R54.1 U5.4
BMS_SW: C29.1 L6.P$1 U5.19 U5.20
BT_NDISABLE: 1-100.91 BT_DIS.TP
CAM0_C_N: 101-200.40
CAM0_C_P: 101-200.42
CAM0_D0_N: 101-200.28
CAM0_D0_P: 101-200.30
CAM0_D1_N: 101-200.34
CAM0_D1_P: 101-200.36
CAM1_C_N: 101-200.27
CAM1_C_P: 101-200.29
CAM1_D0_N: 101-200.15
CAM1_D0_P: 101-200.17
CAM1_D1_N: 101-200.21
CAM1_D1_P: 101-200.23
CAM1_D2_N: 101-200.33
CAM1_D2_P: 101-200.35
CAM1_D3_N: 101-200.39
CAM1_D3_P: 101-200.41
CAMERA_GPIO: 1-100.97
CC1: D2.1 J1.A5 R11.1 U7.13
CC2: D2.2 J1.B5 R20.1 U7.12
CM4_1.8V(OUTPUT): 1-100.88 1-100.90 CM4_1.8V.TP
CM4_3.3V(OUTPUT): 1-100.78 1-100.84 1-100.86 C12.1 C13.1 C17.1 C18.2 C26.2 C68.2 CM4_3.3V.TP LEDN_ACT.A MICROSD_SWI.VIN R2.1 R38.1 R44.1 R47.1 R48.1 R53.1 R56.2 U6.8 U6.10 U6.32 U16.1 U20.5 U22.VCC Y1.1 Y1.4
CVB: R12.2 U1.47
D1_PORT_N [USB 2.0 Differential Pair]: J1.A7 J1.B7 U4.4 U9.4 U10.2
D1_PORT_P [USB 2.0 Differential Pair]: J1.A6 J1.B6 U4.3 U9.5 U10.1
D8: LEFTPCB.7 RIGHTPCB.8
D9: LEFTPCB.8 RIGHTPCB.7
D10: LEFTPCB.9 RIGHTPCB.6
D11: LEFTPCB.10 RIGHTPCB.5
D12: LEFTPCB.11 RIGHTPCB.4
D13: LEFTPCB.12 RIGHTPCB.3
D15: LEFTPCB.13 RIGHTPCB.2
D16: LEFTPCB.14 RIGHTPCB.1
D_N [USB 2.0 Differential Pair]: RIGHTPCB.13 U4.2 U9.2 U12.2
D_P [USB 2.0 Differential Pair]: RIGHTPCB.12 U4.1 U9.3 U12.1
DAC: R17.2 U6.14
DISPEN: R12.6 U3.P$9
DSI0_C_N: 101-200.69
DSI0_C_P: 101-200.71
DSI0_D0_N: 101-200.57
DSI0_D0_P: 101-200.59
DSI0_D1_N: 101-200.63
DSI0_D1_P: 101-200.65
DSI1_C_N: 101-200.87
DSI1_C_P: 101-200.89
DSI1_D0_N: 101-200.75
DSI1_D0_P: 101-200.77
DSI1_D1_N: 101-200.81
DSI1_D1_P: 101-200.83
DSI1_D2_N: 101-200.93
DSI1_D2_P: 101-200.95
DSI1_D3_N: 101-200.94
DSI1_D3_P: 101-200.96
DVDD: C2.1 C3.1 C53.1 C54.1 FB1.2 JU_4.2 R49.2 U1.6 U1.7 U1.38 U1.67 U1.99
EEPROM_NWP: 1-100.20
EN: R31.2 U8.9 U14.4
ETHERNET_NLED1: 1-100.19
ETHERNET_NLED2: 1-100.17
ETHERNET_NLED3: 1-100.15
ETHERNET_PAIR0_N: 1-100.10
ETHERNET_PAIR0_P: 1-100.12
ETHERNET_PAIR1_N: 1-100.6
ETHERNET_PAIR1_P: 1-100.4
ETHERNET_PAIR2_N: 1-100.9
ETHERNET_PAIR2_P: 1-100.11
ETHERNET_PAIR3_N: 1-100.5
ETHERNET_PAIR3_P: 1-100.3
ETHERNET_SYNC_IN: 1-100.16
ETHERNET_SYNC_OUT: 1-100.18
G0: R8.4 U1.20
G1: R8.3 U1.21
G2: R8.2 U1.22
G3: R8.1 U1.23
G4: R9.4 U1.24
G5: R9.3 U1.25
G6: R9.2 U1.26
G7: R9.1 U1.27
GLOBAL_EN: 1-100.99 GLOBAL_EN.TP JU_2.1 JU_2.2 U14.15
GND: 1-100.1 1-100.2 1-100.7 1-100.8 1-100.13 1-100.14 1-100.22 1-100.23 1-100.32 1-100.33 1-100.42 1-100.43 1-100.52 1-100.53 1-100.59 1-100.60 1-100.65 1-100.66 1-100.71 1-100.74 1-100.98 101-200.1 101-200.7 101-200.8 101-200.13 101-200.14 101-200.19 101-200.20 101-200.25 101-200.26 101-200.31 101-200.32 101-200.37 101-200.38 101-200.44 101-200.50 101-200.55 101-200.56 101-200.61 101-200.62 101-200.67 101-200.68 101-200.73 101-200.74 101-200.79 101-200.80 101-200.85 101-200.86 101-200.91 101-200.92 101-200.97 101-200.98 C1.1 C2.2 C3.2 C4.1 C5.2 C6.2 C7.2 C8.2 C9.2 C10.2 C11.2 C12.2 C13.2 C14.2 C15.2 C16.2 C17.2 C18.1 C19.1 C20.2 C21.2 C22.2 C23.1 C24.2 C25.2 C26.1 C27.1 C28.1 C30.1 C31.1 C32.2 C33.2 C34.2 C37.1 C38.2 C39.2 C40.1 C41.2 C42.2 C43.2 C44.1 C45.2 C46.1 C47.1 C48.2 C49.2 C50.2 C51.2 C52.2 C53.2 C54.2 C55.1 C56.2 C57.1 C58.2 C59.1 C60.2 C61.2 C62.1 C63.2 C66.1 C67.1 C68.1 C69.2 D2.3 D3.1 J1.A1B12 J1.B1A12 J1.SHIELD_1 J1.SHIELD_2 J1.SHIELD_3 J1.SHIELD_4 J2.1 J5.1 J5.4 J5.7 J5.10 J5.13 J5.S1 J5.S2 J5.S3 J5.S4 J6.4 J6.S1 J6.S2 JU_6.1 LEFTPCB.4 LEFTPCB.P1 LEFTPCB.P2 M-SD.6 M-SD.S1 M-SD.S2 M-SD.S3 M-SD.S4 MICROSD_SWI.GND Q1.2 Q2.2 Q3.2 Q4.2 R10.2 R11.2 R20.2 R22.2 R23.2 R24.2 R25.2 R27.2 R28.2 R30.2 R31.1 R35.1 R37.1 R39.1 R40.2 R41.1 R43.1 R45.1 R52.1 R55.2 R56.1 RIGHTPCB.11 RIGHTPCB.P1 RIGHTPCB.P2 TP4.TP U1.1 U1.4 U1.5 U1.19 U1.28 U1.39 U1.45 U1.58 U1.68 U1.76 U1.79 U1.83 U1.87 U1.89 U1.92 U1.98 U1.P$1 U1.P$2 U1.P$3 U1.P$4 U1.P$5 U1.P$6 U1.P$7 U1.P$8 U1.P$9 U1.P$10 U1.P$11 U1.P$12 U1.P$13 U1.P$14 U1.P$15 U1.P$16 U1.THERMAL U2.2 U2.5 U3.P$1 U3.P$2 U3.P$7 U3.P$14 U3.P$40 U4.5 U4.6 U5.2 U5.8 U5.9 U5.17 U5.18 U5.25 U6.9 U6.20 U6.24 U6.28 U6.33 U7.5 U8.11 U9.25 U10.3 U12.3 U13.3 U14.8 U14.PAD U15.2 U16.5 U16.6 U16.9 U16.P$1 U16.P$2 U16.P$3 U17.3 U17.7 U19.3 U20.3 U22.GND U$29.2 Y1.2 Y2.2 Y2.4
GPIO4_BMS_STAT: 1-100.54 R54.2 R55.1
GPIO5: 1-100.34
GPIO6: 1-100.30
GPIO7: 1-100.37
GPIO8: 1-100.39
GPIO9: 1-100.40
GPIO10: 1-100.44
GPIO11: 1-100.38
GPIO13_PI_FAN: 1-100.28 Q1.1 R52.2
GPIO14_HP_DETECT: 1-100.55 GPIO14.TP J2.4 J2.5 R23.1
GPIO15_V-: 1-100.51 GPIO15.TP J6.3
GPIO16_VOLTAGE_SHUTDOWN: 1-100.29 U19.2
GPIO16_VOLTAGE_SHUTDOWN_ATTINY: U14.5 U19.4
GPIO17_INT: 1-100.50 R53.2 U11.8
GPIO22: 1-100.46
GPIO23: 1-100.47
GPIO24_V+: 1-100.45 J6.2
GPIO25_PI_SHUTDOWN_INIT: 1-100.41 JU_5.2
GPIO25_PI_SHUTDOWN_INIT_ATTINY: U14.3 U20.2
GPIO25_PI_SHUTDOWN_INIT_JUP: JU_5.1 U20.4
GPIO26: 1-100.24
GPIO27: 1-100.48
GPIO_12_SCREEN_PWM: 1-100.31 Q4.1 R10.1
GPIO_18_BCLK: 1-100.49 R16.1
GPIO_19_LRCLK: 1-100.26 R18.1
GPIO_20_I2S_ADC: 1-100.27 R19.1
GPIO_21_SD: 1-100.25 R17.1
HDMI0_CEC: 101-200.51
HDMI0_CLK_N [HDMI]: 101-200.90 U1.94
HDMI0_CLK_P0 [HDMI]: 101-200.88 U1.93
HDMI0_HOTPLUG: 101-200.53
HDMI0_SCL: 101-200.100 R3.1 TP1.TP U2.1
HDMI0_SDA: 101-200.99 R4.1 TP2.TP U2.3
HDMI0_TX0_N [HDMI]: 101-200.84 U1.91
HDMI0_TX0_P [HDMI]: 101-200.82 U1.90
HDMI0_TX1_N [HDMI]: 101-200.78 U1.86
HDMI0_TX1_P [HDMI]: 101-200.76 U1.85
HDMI0_TX2_N [HDMI]: 101-200.72 U1.81
HDMI0_TX2_P [HDMI]: 101-200.70 U1.80
HDMI1_CEC: 101-200.49 J5.14
HDMI1_CLK_N [HDMI]: 101-200.66 J5.12
HDMI1_CLK_P [HDMI]: 101-200.64 J5.11
HDMI1_HOTPLUG: 101-200.43 J5.19
HDMI1_SCL: 101-200.47 J5.15
HDMI1_SDA: 101-200.45 J5.16
HDMI1_TX0_N [HDMI]: 101-200.60 J5.9
HDMI1_TX0_P [HDMI]: 101-200.58 J5.8
HDMI1_TX1_N [HDMI]: 101-200.54 J5.6
HDMI1_TX1_P [HDMI]: 101-200.52 J5.5
HDMI1_TX2_N [HDMI]: 101-200.48 J5.3
HDMI1_TX2_P [HDMI]: 101-200.46 J5.2
HDMI_5.0V: C61.1 J5.18 R30.1 U15.6
HP_L: C35.2 J2.3
HP_R: C36.2 J2.2
HSYNC: R12.8 U3.P$11
I2S_MCLK: R15.1 Y1.3
ID_SC: 1-100.35
ID_SD: 1-100.36
LED+: C58.1 D4.1 U3.P$41
LED-: R22.1 U3.P$42 U17.1
MCLK: R15.2 U6.11
MISO: U14.20 U$29.5
N$1: C57.2 U17.2
N$2: D4.2 L8.2 U17.4
N$3: LEDN.TP LEDN_ACT.C R13.2
N$4: R8.5 U3.P$30
N$5: R8.6 U3.P$29
N$6: R8.7 U3.P$28
N$7: R8.8 U3.P$27
N$8: R9.5 U3.P$26
N$9: R9.6 U3.P$25
N$10: C14.1 U6.27
N$11: R6.5 U3.P$38
N$12: R6.6 U3.P$37
N$13: R6.7 U3.P$36
N$14: R6.8 U3.P$35
N$15: R7.5 U3.P$34
N$16: R7.6 U3.P$33
N$17: R7.7 U3.P$32
N$18: R7.8 U3.P$31
N$19: R9.7 U3.P$24
N$20: R9.8 U3.P$23
N$21: R1.5 U3.P$22
N$22: R1.6 U3.P$21
N$23: R1.7 U3.P$20
N$24: R1.8 U3.P$19
N$25: R14.8 U3.P$15
N$26: R14.7 U3.P$16
N$27: R14.6 U3.P$17
N$28: R14.5 U3.P$18
N$29: C55.2 U5.23
N$30: C64.1 U11.7
N$31: LEDN_PWR.A R48.2
N$32: R39.2 U11.5
N$33: C29.2 U5.21
N$34: R41.2 U5.10
N$35: C35.1 U6.31
N$36: R40.1 U9.14
N$37: R21.2 SJ3.2
N$39: C36.1 U6.29
N$40: JU_4.1 R43.2 U1.100
N$41: R39.3 U11.2 U11.6 U11.11
N$42: D1.1 J3.2 Q1.3
N$43: Q2.3 Q4.3 R42.1 U17.5
N$44: Q2.1 Q3.3 R36.1
N$51: LEDN_PWR.C R44.2 U22.Y
N$58: U8.1 U8.2 U18.1
N$59: R25.1 U9.24
N$60: R26.1 R35.2 U16.7
N$67: C40.2 U9.10
N$68: R28.1 U9.17
N$69: R27.1 U9.13
N$70: C45.1 R29.1 U9.21 Y2.1
N$71: C48.1 R29.2 U9.22 Y2.3
NEW: JU_6.2 R49.1 U1.3
NEXTRST: 1-100.100 NEXTRST.TP
NRPIBOOT: 1-100.93 NRPIBOOT.TP
OVDD: C5.1 C6.1 C7.1 C8.1 C51.1 C52.1 FB2.2 U1.18 U1.29 U1.43 U1.57 U1.78
PCIE_CLK_N: 101-200.12
PCIE_CLK_NREQ: 101-200.2
PCIE_CLK_P: 101-200.10
PCIE_NRST: 101-200.9
PCIE_RX_N: 101-200.18
PCIE_RX_P: 101-200.16
PCIE_TX_N: 101-200.24
PCIE_TX_P: 101-200.22
PI_LED_NPWR: 1-100.95 U22.A
PI_NLED_ACTIVITY: 1-100.21 R13.1
PIXCLK: R12.5 U3.P$13
PK-: C64.2 C65.2 J4.1 J4.2 R39.4
PVDD: C10.1 C21.1 C22.1 C24.1 FB4.2 U1.97
PWR_BUTTON: J6.1 U14.14
R0: R6.4 U1.30
R1: R6.3 U1.31
R2: R6.2 U1.32
R3: R6.1 U1.33
R4: R7.4 U1.34
R5: R7.3 U1.35
R6: R7.2 U1.36
R7: R7.1 U1.37
REGN: C30.2 R46.2 U5.22
RESET: R5.2 U14.13 U$29.6
RUN_PG: 1-100.92 JU_3.1 JU_3.2 RUN_PG.TP U14.2
SBU1_DOCK: J1.A8 R24.1 U4.9
SCK/BMS_SCL: R33.2 U5.5 U14.1 U$29.3
SCL0: 1-100.80
SCL1: 1-100.56 R47.2 U6.17 U11.3
SD_CLK: 1-100.57 M-SD.5
SD_CMD: 1-100.62 M-SD.3
SD_DAT0: 1-100.63 M-SD.7
SD_DAT1: 1-100.67 M-SD.8
SD_DAT2: 1-100.69 M-SD.1
SD_DAT3: 1-100.61 M-SD.2
SD_DAT4: 1-100.68
SD_DAT5: 1-100.64
SD_DAT6: 1-100.72
SD_DAT7: 1-100.70
SD_PWR_ON: 1-100.75 MICROSD_SWI.EN R2.2
SD_VDD_OVERRIDE: 1-100.73
SDA0: 1-100.82
SDA1: 1-100.58 R38.2 U6.18 U11.4
SEL: SJ3.1 U7.11
SPK_LN: L-.TP U6.23
SPK_LP: L+.TP U6.25
SPK_RN: R-.TP U6.19
SPK_RP: R+.TP U6.22
TS: R45.2 R46.1 U5.11 U5.12
USB_PI_N: 101-200.3 U4.7 U9.19 U13.2
USB_PI_P: 101-200.5 U4.8 U9.20 U13.1
VBUS: C1.2 C33.1 C34.1 C66.2 C67.2 D3.2 J1.A4B9 J1.B4A9 R21.1 U5.1 U5.24 U7.2 U7.16
VDAC_COMP: 101-200.11
VSYNC: R12.7 U3.P$10
VSYS: C4.2 C19.2 C23.2 C27.2 C28.2 C44.2 C46.2 C62.2 L6.P$2 R5.1 R32.1 R33.1 U5.15 U5.16 U8.10 U14.9 U16.3 U16.4 U18.2 U19.5 U$29.1
WL_NDISABLE: 1-100.89 WL_DIS.TP
WS: R18.2 U6.13 U6.15
XCV: R12.1 U1.48
ZXC: R12.4 U1.44

## Tracks (layer width: path | path; a pad name or v marks a point on that pad's centre or on a via)
3.3_SD_PWR  (via drill 0.2)
  Route15 0.406: v57.5,80.3 67.6,80.3 76.66,71.24 76.66,4.86 75.5,3.7 65.53,3.7 64.75,2.92 27.43,2.92 26.15,1.65 19.18,1.65 18.63,2.2 v18.57,2.2
  Bottom 0.305: MICROSD_SWI.VOUT 57.15,79.95 v57.5,80.3 3.3_SD_PWR.TP
  Bottom 0.406: C59.2 16.8,8.5 18.57,6.72 M-SD.4 v18.57,2.2
3V3  (via drill 0.2)
  Top 0.406: v61.9,19.17 61.9,14.6 v61.5,14.2 | v61.9,6.85 61.05,6.85 60.4,7.5 60.4,8.5 62.1,10.2 62.1,11.4 v63.85,13.15 v63.86,13.15
  Route15 0.305: 26.6,44 26.62,44.02
  Route15 0.406: 26.6,44 26.6,41.9 30.6,37.9 38.17,37.9 v38.92,37.15 | v57.3,16.98 55.1,19.17 54.6,19.17
  Route15 0.508: 25.68,43.08 26.62,44.02 | 31.18,48.58 31.5,48.9 | 53.4,26.6 53.3,26.6
  Route15 0.607: 26,48.9 v22.7,45.6
  Route15 0.61: 26,48.9 31.5,48.9 51.75,48.9 60.9,39.75 60.9,28.8 58.7,26.6 v54.1,26.6 53.4,26.6 | v61.9,19.17 v60.18,19.17 54.6,19.17 53.9,18.47 48.73,18.47 47.7,19.5 47.7,25.35 48.95,26.6 v49.5,26.6 53.3,26.6 v53.5,26.6 | 31.18,48.58 25.68,43.08 22.8,40.2 22.8,37.5 23.55,36.74 23.55,20.11 22.55,19.11 22.55,15.15 24.7,13 v25.3,13
  Bottom 0.305: R26.2 C47.2 | U9.15 v60.18,19.17 U9.16 | U3.P$39 38.9,37.17 v38.92,37.15 | U4.10 v61.9,6.85 62.25,6.85 C37.2
  Bottom 0.406: U9.9 v57.3,16.98 56.77,16.98 C38.1 | FB2.1 17.11,45 17.66,45.54 22.64,45.54 v22.7,45.6 | U9.18 v61.9,19.17 | v22.7,45.6 23.43,44.87 23.43,41.47 25.97,38.93 30.27,38.93 31.6,37.6 FB3.1 32.35,35.1 32.9,34.55 32.9,28.95 32.17,28.22 FB4.1 | v22.7,45.6 22.06,44.96 FB1.1 | v63.86,13.15 C39.1 62.05,13.15 61.5,13.7 v61.5,14.2 61.5,15.23 U9.1
  Bottom 0.508: C32.1 50.35,26.6 v49.5,26.6 v48.9,26.6 | C63.1 52.65,26.6 v53.5,26.6 v54.1,26.6
  other vias: 26.5,13.6 25.9,13.6 26.5,14.2 25.9,14.2 25.3,14.2 25.3,13.6 25.3,12.4 25.9,13 25.9,12.4 26.5,13 26.5,12.4
  pour Bottom (no thermals): 27.38,13.38 27.38,12.12 27.5,12 27.5,11.25 arc-90 27.25,11 25.2,11 arc-90 24.95,11.25 24.95,14.3 arc-90 25.2,14.55 26.6,14.55 arc-90 26.85,14.3 26.85,13.38
+5V  (via drill 0.2)
  Top 0.305: v30.5,7.2 v30.5,5.6 | v30.5,6.4 30.81,6.09 v45.44,6.09 | v10.9,44.7 10.9,45.4 9.2,47.1 v6.8,47.1 | v30.91,13.54 30.59,13.22 29.49,13.22 28.65,12.38 28.65,9.45 v29.3,8.8 | v49.8,13.45 49.6,13.45 49.34,13.19 49.34,12.61 48.39,11.66 47.38,11.66 47.21,11.49 46.14,11.49 v46.1,11.45 | v29.3,7.2 v24.5,7.2 v23.8,7.2 v23.1,7.2
  Route15 0.305: v48.8,81.1 v47.55,81.1
  Route15 0.406: v65.7,62.9 64.25,62.9
  Route15 0.508: v71.3,29 71.3,34.6 47.9,58 26.2,58 | 28,60.5 49.05,60.5 v60.6,48.95 61.55,48 v75.44,48 | 29.3,62.9 64.25,62.9 v68.5,67.15 v69.1,67.15 v69.7,67.15
  Bottom 0.203: 1-100.81 45.71,78.61 v45.3,78.2 | U8.7 v30.9,13.54 v30.91,13.54 | 1-100.83 46.11,78.41 v45.9,78.2 | 1-100.85 v46.51,78.21 v46.5,78.2 | 1-100.87 46.91,78.4 v47.11,78.2 | v44.1,78.2 44.91,79.01 1-100.77 | v44.7,78.2 45.31,78.81 1-100.79
  Bottom 0.305: U6.26 70.45,66.85 C15.1 v68.5,67.15 | U6.21 66.65,62.7 C16.1 | RIGHTPCB.14 LEFTPCB.1 71.25,29.95 v71.3,30 v71.3,29.5 v71.3,29 | v49.8,13.45 U15.1 52.15,13.45 52.43,13.73 52.43,14.47 | U15.3 52.15,14.75 52.43,14.47 | +5V.TP v48.8,81.1 | TP3.TP v10.9,44.7 | v6.8,47.1 6.8,46.4 6.42,46.02 5.58,46.02 | R34.1 52.43,16.23 52.43,14.47 | v46.1,11.45 46.23,11.32 46.23,6.88 v45.44,6.09 | v26.35,0.58 J3.1 26.8,1.18 26.8,6.12 D1.3 25.55,7.2 v24.5,7.2 v23.8,7.2 v23.1,7.2
  Bottom 0.406: v14.1,52.4 9.3,52.4 6.2,49.3 C20.1 5.82,47.85 U2.4 5.58,46.02 5.18,45.62 R4.2 R3.2 | U15.1 51.24,13.25 C60.1 | U17.6 75.54,47.9 v75.44,48 | R42.2 v60.6,48.95 60.6,50.6 61.7,51.7 66.2,51.7 66.75,51.15 R36.2 | C16.1 66.45,62.9 v65.7,62.9 v65.1,62.9
  other vias: 30.5,8 30.5,8.8 29.9,8.8 29.9,8 29.3,8 29.9,7.2 29.9,6.4 29.3,6.4 29.3,5.6 29.9,5.6
  pour Bottom (no thermals): 31.5,10.4 31.5,9 32.05,9 arc-90 32.3,8.75 32.3,5.49 arc-90 32.05,5.24 29.24,5.24 arc-90 28.99,5.49 28.99,8.91 arc-90 29.24,9.16 30.76,9.16 30.76,10.4
  pour Route15 (no thermals): 30.7,9.4 27.7,9.4 22.1,15 22.1,19.3 23.07,20.27 23.07,36.53 22.27,37.33 22.27,53.37 43.2,74.3 47.8,74.3 48,74.5 48,81.9 47.8,82.1 38.9,82.1 13.5,56.7 13.5,11.1 19.6,5 30.7,5 31,5.3 31,9.1
  pour Bottom (no thermals): 75.97,52.75 78.85,52.75 arc-90 79.1,52.5 79.1,47.25 arc-90 78.85,47 75.55,47 arc-90 75.3,47.25 75.3,48 75.72,48.42 75.72,52.5 arc-90
A2
  Bottom 0.152: LEFTPCB.5 RIGHTPCB.10
A3
  Bottom 0.152: RIGHTPCB.9 LEFTPCB.6
ACTIVE  (via drill 0.2)
  Top 0.305: v20.59,25.03 21.97,26.41 30.19,26.41 31.31,27.53 31.31,32.59 34.32,35.6 36.1,35.6 38.6,38.1 51.55,38.1 | 51.55,38.1 v52.4,37.25 | 51.55,38.1 57.39,38.1 v57.41,38.12
  Bottom 0.305: U1.8 20.81,24.81 v20.59,25.03 | v52.4,37.25 U3.P$12 | v57.41,38.12 57.6,38.12 60.98,41.51 65.05,41.51 Q3.1 67.45,43.91 R37.2
ADC
  Bottom 0.203: U6.16 66.56,60.02 64.8,58.25 R19.2
ASD
  Bottom 0.203: U1.46 8.91,35.39 5.79,38.51 R12.3
AVDD  (via drill 0.2)
  Route15 0.406: v25.2,33.4 25.99,32.6 25.99,28.77 25.11,27.89 v25.1,27.89
  Bottom 0.305: C25.1 31.5,31.45 | 31.5,31.45 C11.1 C49.1 28.05,31.39 U1.88 | U1.84 25.21,33.39 v25.2,33.4 25,33.6 25,34.2 25.19,34.39 U1.82 27.79,34.39 C9.1 C50.1 29.94,34.73 FB3.2 31.6,31.56 31.5,31.45 | v25.1,27.89 U1.95
B0
  Bottom 0.203: R1.4 25.8,19.55 24.23,21.12 21.6,21.12 19.81,22.91 U1.10
B1
  Bottom 0.203: R1.3 24.9,19.53 23.6,20.83 21.41,20.83 19.31,22.93 U1.11
B2
  Bottom 0.203: R1.2 24.1,19.45 23.01,20.54 21.26,20.54 18.81,22.98 U1.12
B3
  Bottom 0.203: R1.1 22.2,20.25 21.05,20.25 18.31,22.98 U1.13
B4
  Bottom 0.203: U1.14 17.81,22.98 20.84,19.95 21.25,19.95 21.55,19.65 R14.4
B5
  Bottom 0.203: R14.3 20.65,19.63 17.31,22.97 U1.15
B6
  Bottom 0.203: U1.16 16.81,22.95 19.85,19.92 R14.2
B7
  Bottom 0.203: R14.1 18.95,20.35 16.31,22.99 U1.17
BAT
  Bottom 0.305: U11.10 41.99,10.19 42.21,10.41 C65.1
  pour Bottom (no thermals): 43.9,12.8 43.9,1.48 arc-90 43.65,1.23 42.25,1.23 arc-90 42,1.48 42,15.45 arc-90 42.25,15.7 44.85,15.7 arc-90 45.1,15.45 45.1,14.11 arc-45 45.03,13.93
BCLK
  Bottom 0.203: U6.12 71.95,58.75 71.22,58.02 70.1,58.02 69.47,57.4 69.3,57.4 R16.2
BMS_SDA/MOSI  (via drill 0.2)
  Top 0.203: v3.63,61.2 2.43,61.2 0.96,59.74 0.96,55.8 v2.37,54.4 3.96,52.8 v8.25,52.8 | v54.3,25.8 53.99,25.49 50.78,25.49 49.32,24.03 49.32,16.12 49.5,15.94 v49.5,15.05 | v47.99,49.56 48.11,49.56 48.44,49.23 49.19,49.23 50.6,47.82 61.63,47.82 67.68,41.77 67.68,35.49 67.49,35.3 v67.49,34.89
  Bottom 0.203: U5.6 v49.5,15.05 | v8.25,52.8 8.6,52.8 8.8,53 44.75,53 47.99,49.77 v47.99,49.56 | U14.16 v3.63,61.2 3.3,61.53 U$29.4 | v54.3,25.8 55.57,27.07 59.93,27.07 67.49,34.63 v67.49,34.89 | R32.2 v2.37,54.4
BMS_STAT  (via drill 0.2)
  Top 0.203: v56,25.75 55.16,24.91 51.02,24.91 49.91,23.79 49.91,16.72 v50.07,16.55 50.5,16.12 50.5,14.85 49,13.35 49,12.75 48.25,12 v47,12 | v49,50.15 49.1,50.15 50.84,48.41 61.87,48.41 68.42,41.85 68.42,35.73 68.65,35.51 v68.65,34.9
  Bottom 0.203: U5.4 50.55,16.05 R34.2 v50.07,16.55 | v56,25.75 56.73,26.48 60.37,26.48 68.4,34.51 68.4,34.65 v68.65,34.9 | v47,12 46.67,11.68 46.67,8.78 47.08,8.37 47.08,6.25 47.25,6.08 47.25,4.04 48.2,3.08 71.91,3.08 72.8,3.98 J1.B8 | v49,50.15 48.48,50.15 41.85,56.78 R54.1
BMS_SW
  pour Bottom (no thermals): 46.1,18.6 46.1,18.15 arc-90 45.85,17.9 45.55,17.9 arc-90 45.3,18.15 45.3,19.9 44.3,20.9 42.9,20.9 41.65,20.9 arc-90 41.4,21.15 41.4,24.05 arc-90 41.65,24.3 43.15,24.3 arc-90 43.4,24.05 43.4,23.61 arc45 43.47,23.43 44.7,22.2 45.35,22.2 arc-90 45.6,21.95 45.6,20.8 46.03,20.37 arc-45 46.1,20.19
BT_NDISABLE
  Bottom 0.203: 1-100.91 47.71,78.79 48.4,78.1 50.5,78.1 50.9,77.7 50.9,77 51.2,76.7 51.94,76.7 52.5,77.26 52.5,80.33 53.05,80.87 55.26,80.87 56.92,82.53 56.92,83.22 BT_DIS.TP
CC1  (via drill 0.2)
  Top 0.203: v71.6,8.39 71.1,8.89 71.1,11 v71.5,11.4 72.1,12 v72.1,18.62
  Bottom 0.203: R11.1 72.08,22.57 U7.13 72.1,19.95 v72.1,18.62 | J1.A5 72.3,7.69 v71.6,8.39 | v71.5,11.4 D2.1
CC2  (via drill 0.2)
  Top 0.203: v70.3,8.59 70.5,8.79 v70.5,11.4 71.42,12.32 v71.42,18.62
  Bottom 0.203: R20.1 70,21.9 70.4,21.5 71.1,21.5 71.42,21.18 U7.12 v71.42,18.62 | D2.2 70.65,10.75 70.5,10.9 v70.5,11.4 | J1.B5 69.3,8 69.89,8.59 v70.3,8.59
CM4_1.8V(OUTPUT)  (via drill 0.2)
  Top 0.305: v47.1,75.4 47.7,75.4 48.1,75.8 48.1,78.7 v45.9,80.9
  Bottom 0.305: 1-100.90 47.1,76.45 | 47.1,76.45 1-100.88 | 47.1,76.45 v47.1,75.4 | v45.9,80.9 45,81.8 CM4_1.8V.TP
CM4_3.3V(OUTPUT)  (via drill 0.2, 0.25)
  Top 0.152: v9.31,54.5 9.55,54.26 9.55,53.19
  Top 0.203: v10.89,56.08 10.73,56.25 10.73,60.21 10.3,60.63 10.3,64.85 v11.2,65.75 | v1.96,46.79 3.15,46.79 9.55,53.19 | v25.8,15.46 10.47,15.46 v9.93,16
  Top 0.305: v74.5,65.34 74.5,64.39 75.14,63.75 77.7,63.75 78.85,64.9 78.9,64.9
  Top 0.406: v78.9,63 78.9,64.9 v78.9,67.15 78.9,67.85 77.95,68.8 v64.65,68.8 v64.05,68.8 | v42.6,72.42 41.67,72.42 38.01,68.76 v38.01,67.96 v38,67.95 | v77.97,61.8 v78.53,62.37
  Route2 0.203: v9.93,16 9.93,20.32 7.75,22.5 2.25,22.5 0.42,24.33 0.42,45.25 v1.96,46.79
  Route15 0.406: v49.9,77.2 v51.6,77.2 55.21,77.2 63.61,68.8 v64.65,68.8 v65.35,68.8 | v11.2,65.75 12.5,65.75 | 12.5,65.75 15.14,68.39 v15.14,69.1 v15.14,70.5 15.14,71.16 13.05,73.25 v11.8,73.25 | 12.5,65.75 v19.5,65.75 v20,65.75 v20.5,65.75 v21,65.75
  Bottom 0.203: v9.31,54.5 v10.89,56.08 | R56.2 9.93,13.17 v9.93,16 | U16.1 26.01,15.25 v25.8,15.46
  Bottom 0.305: 1-100.86 46.51,76.99 46.3,77.2 | 46.3,77.2 45.1,77.2 44.91,77.01 1-100.78 44.91,73.91 43.42,72.42 v42.6,72.42 R38.1 R47.1 | 1-100.84 46.11,77.01 46.3,77.2 | v49.9,77.2 46.3,77.2 | CM4_3.3V.TP 56.05,84.9 R2.1 55.54,84.21 MICROSD_SWI.VIN 55.54,81.64 55.12,81.21 52.9,81.21 52.15,80.46 52.15,77.75 v51.6,77.2 | U20.5 13.35,69.8 C17.1 | U20.5 v15.14,69.1 | R44.1 v11.8,73.25 | v11.2,65.75 R48.1 C68.2 7.65,66.75 U22.VCC | LEDN_ACT.A 17.6,76.4 18.25,75.75 18.25,71.25 17.5,70.5 v15.14,70.5 U20.5 | U6.32 73.91,65.34 v74.5,65.34